# Altium PCB Rev3.PcbDoc (part 1 of 3)
Units mil, origin at the board's own origin, x right, y up, seen from the top; angles counter-clockwise.
Board outline 3350 x 2700 mil, 4 copper layers (Top Layer, GND, VCC, Bottom Layer), stack 23.756 mil thick; 157 components, 90 nets, 509 pads, 166 vias.
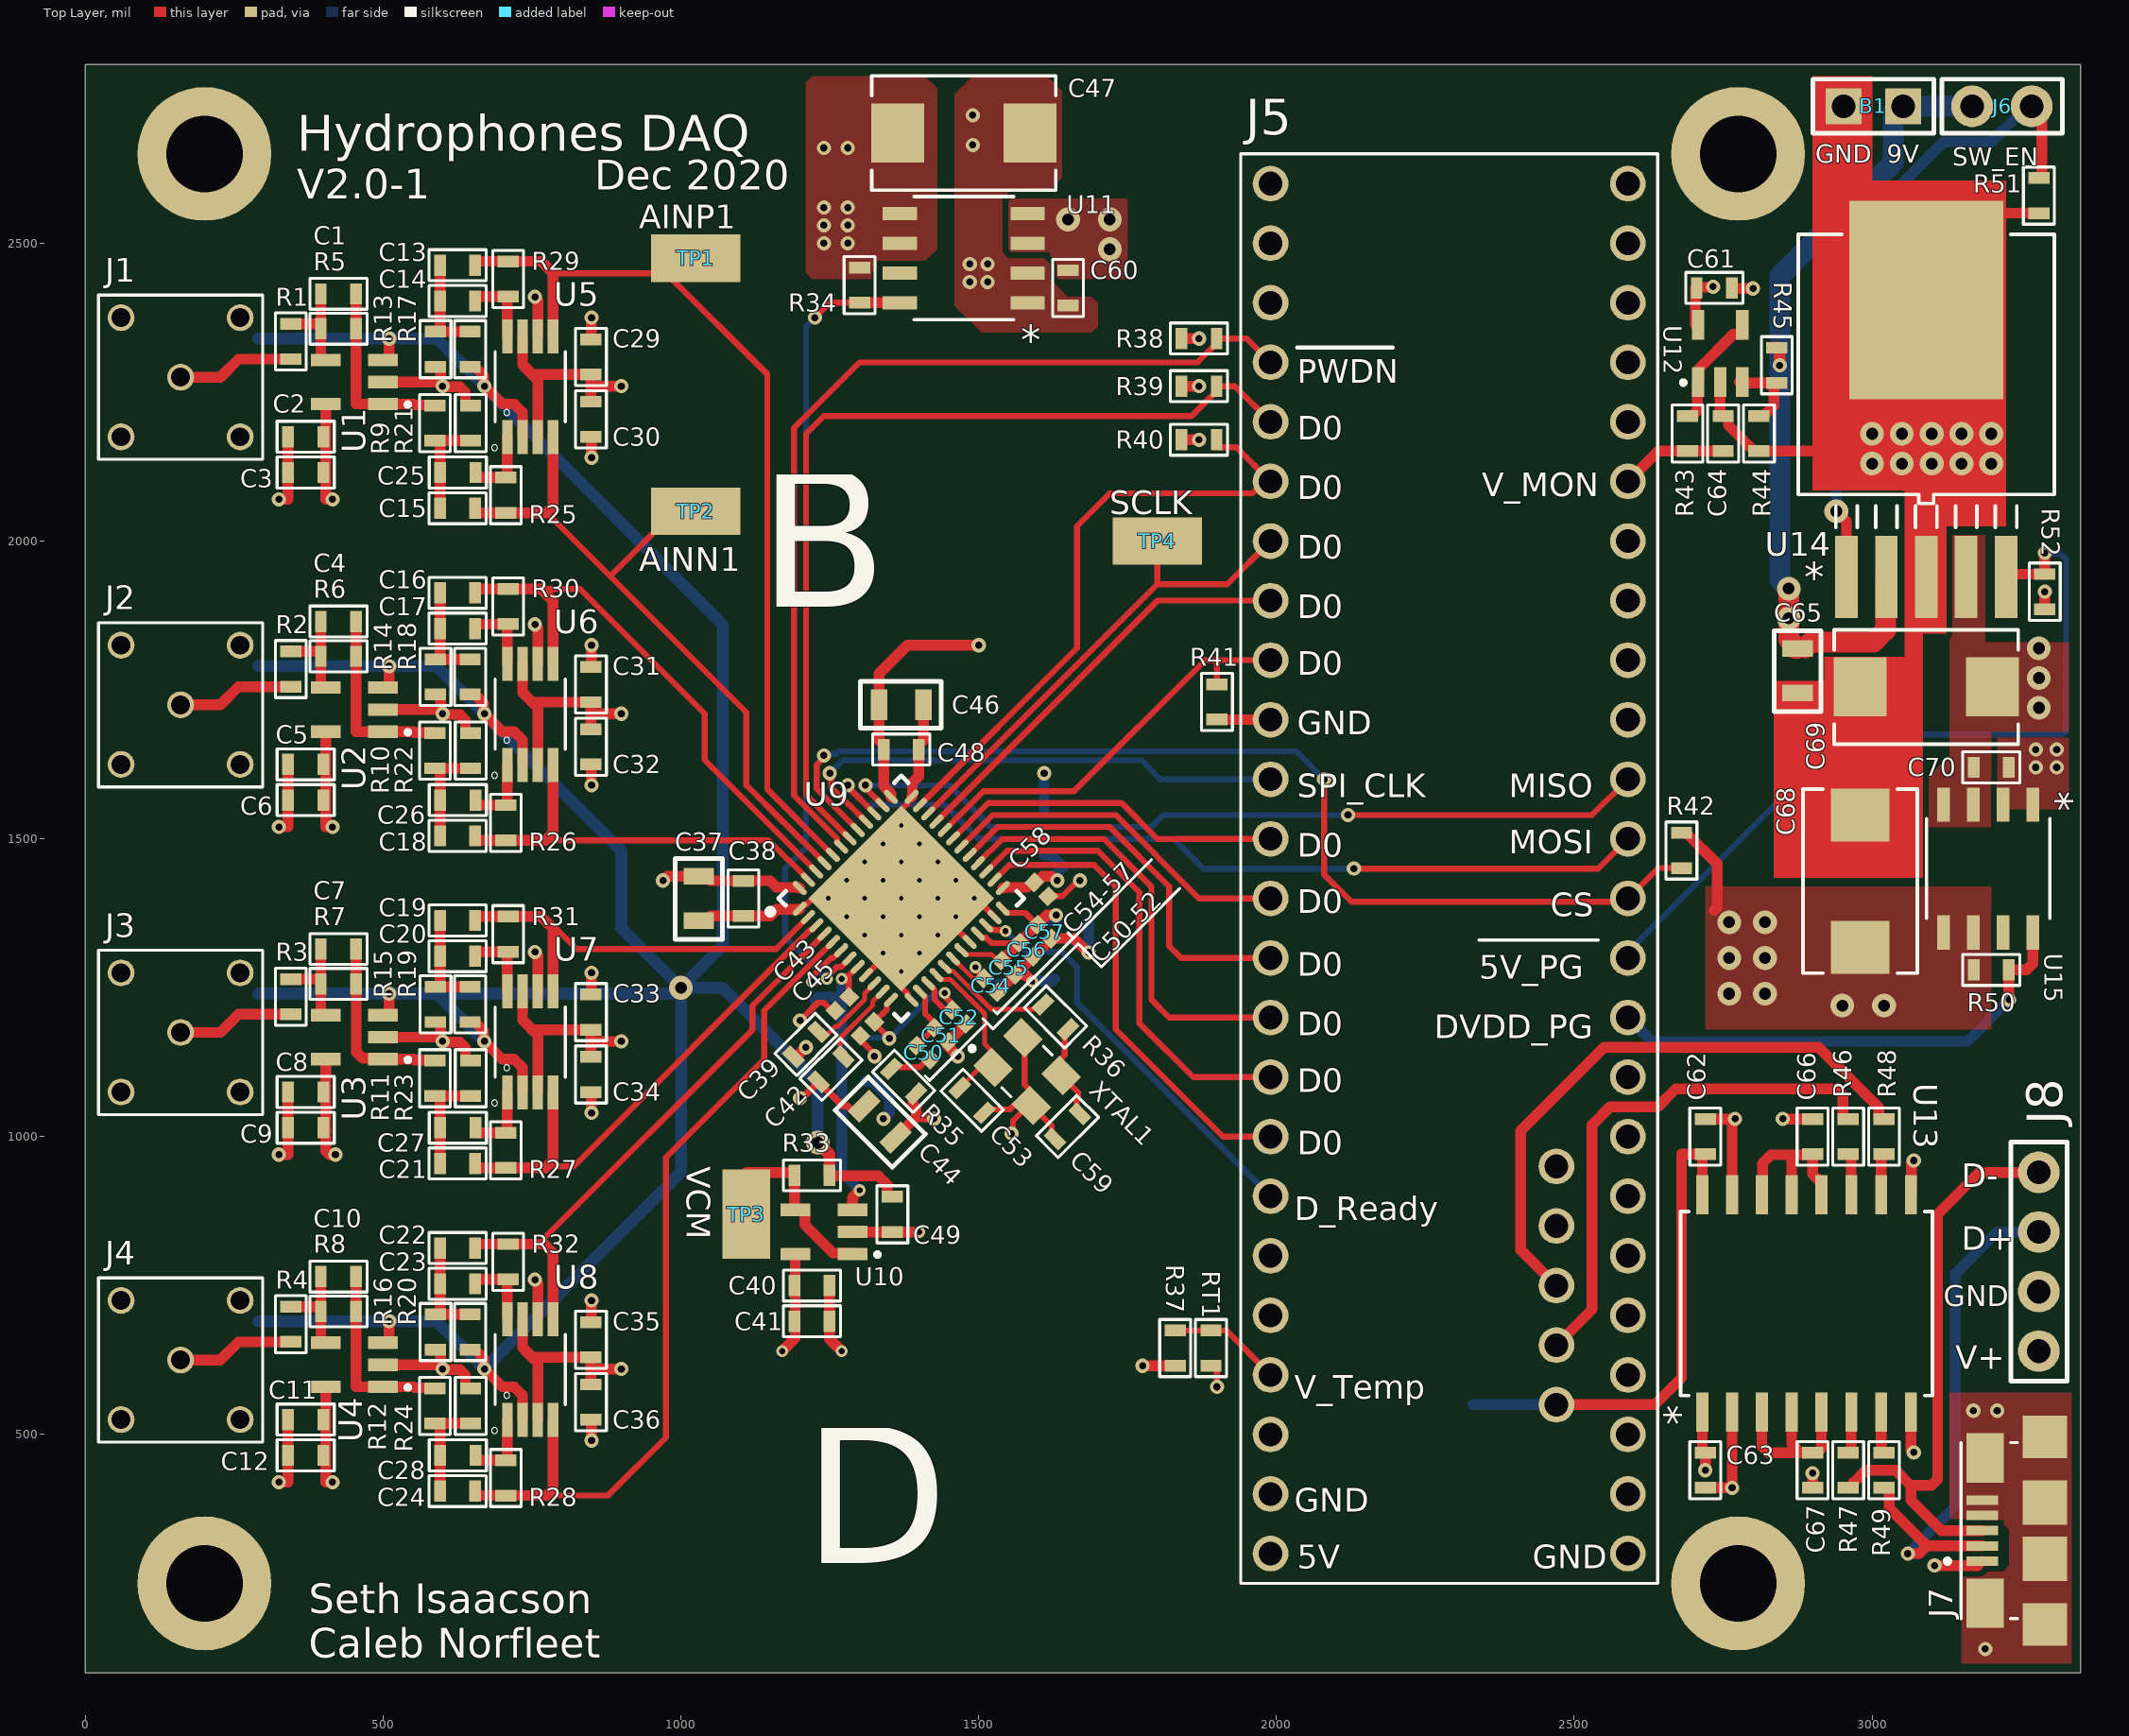
[diagram p0: Top Layer view]
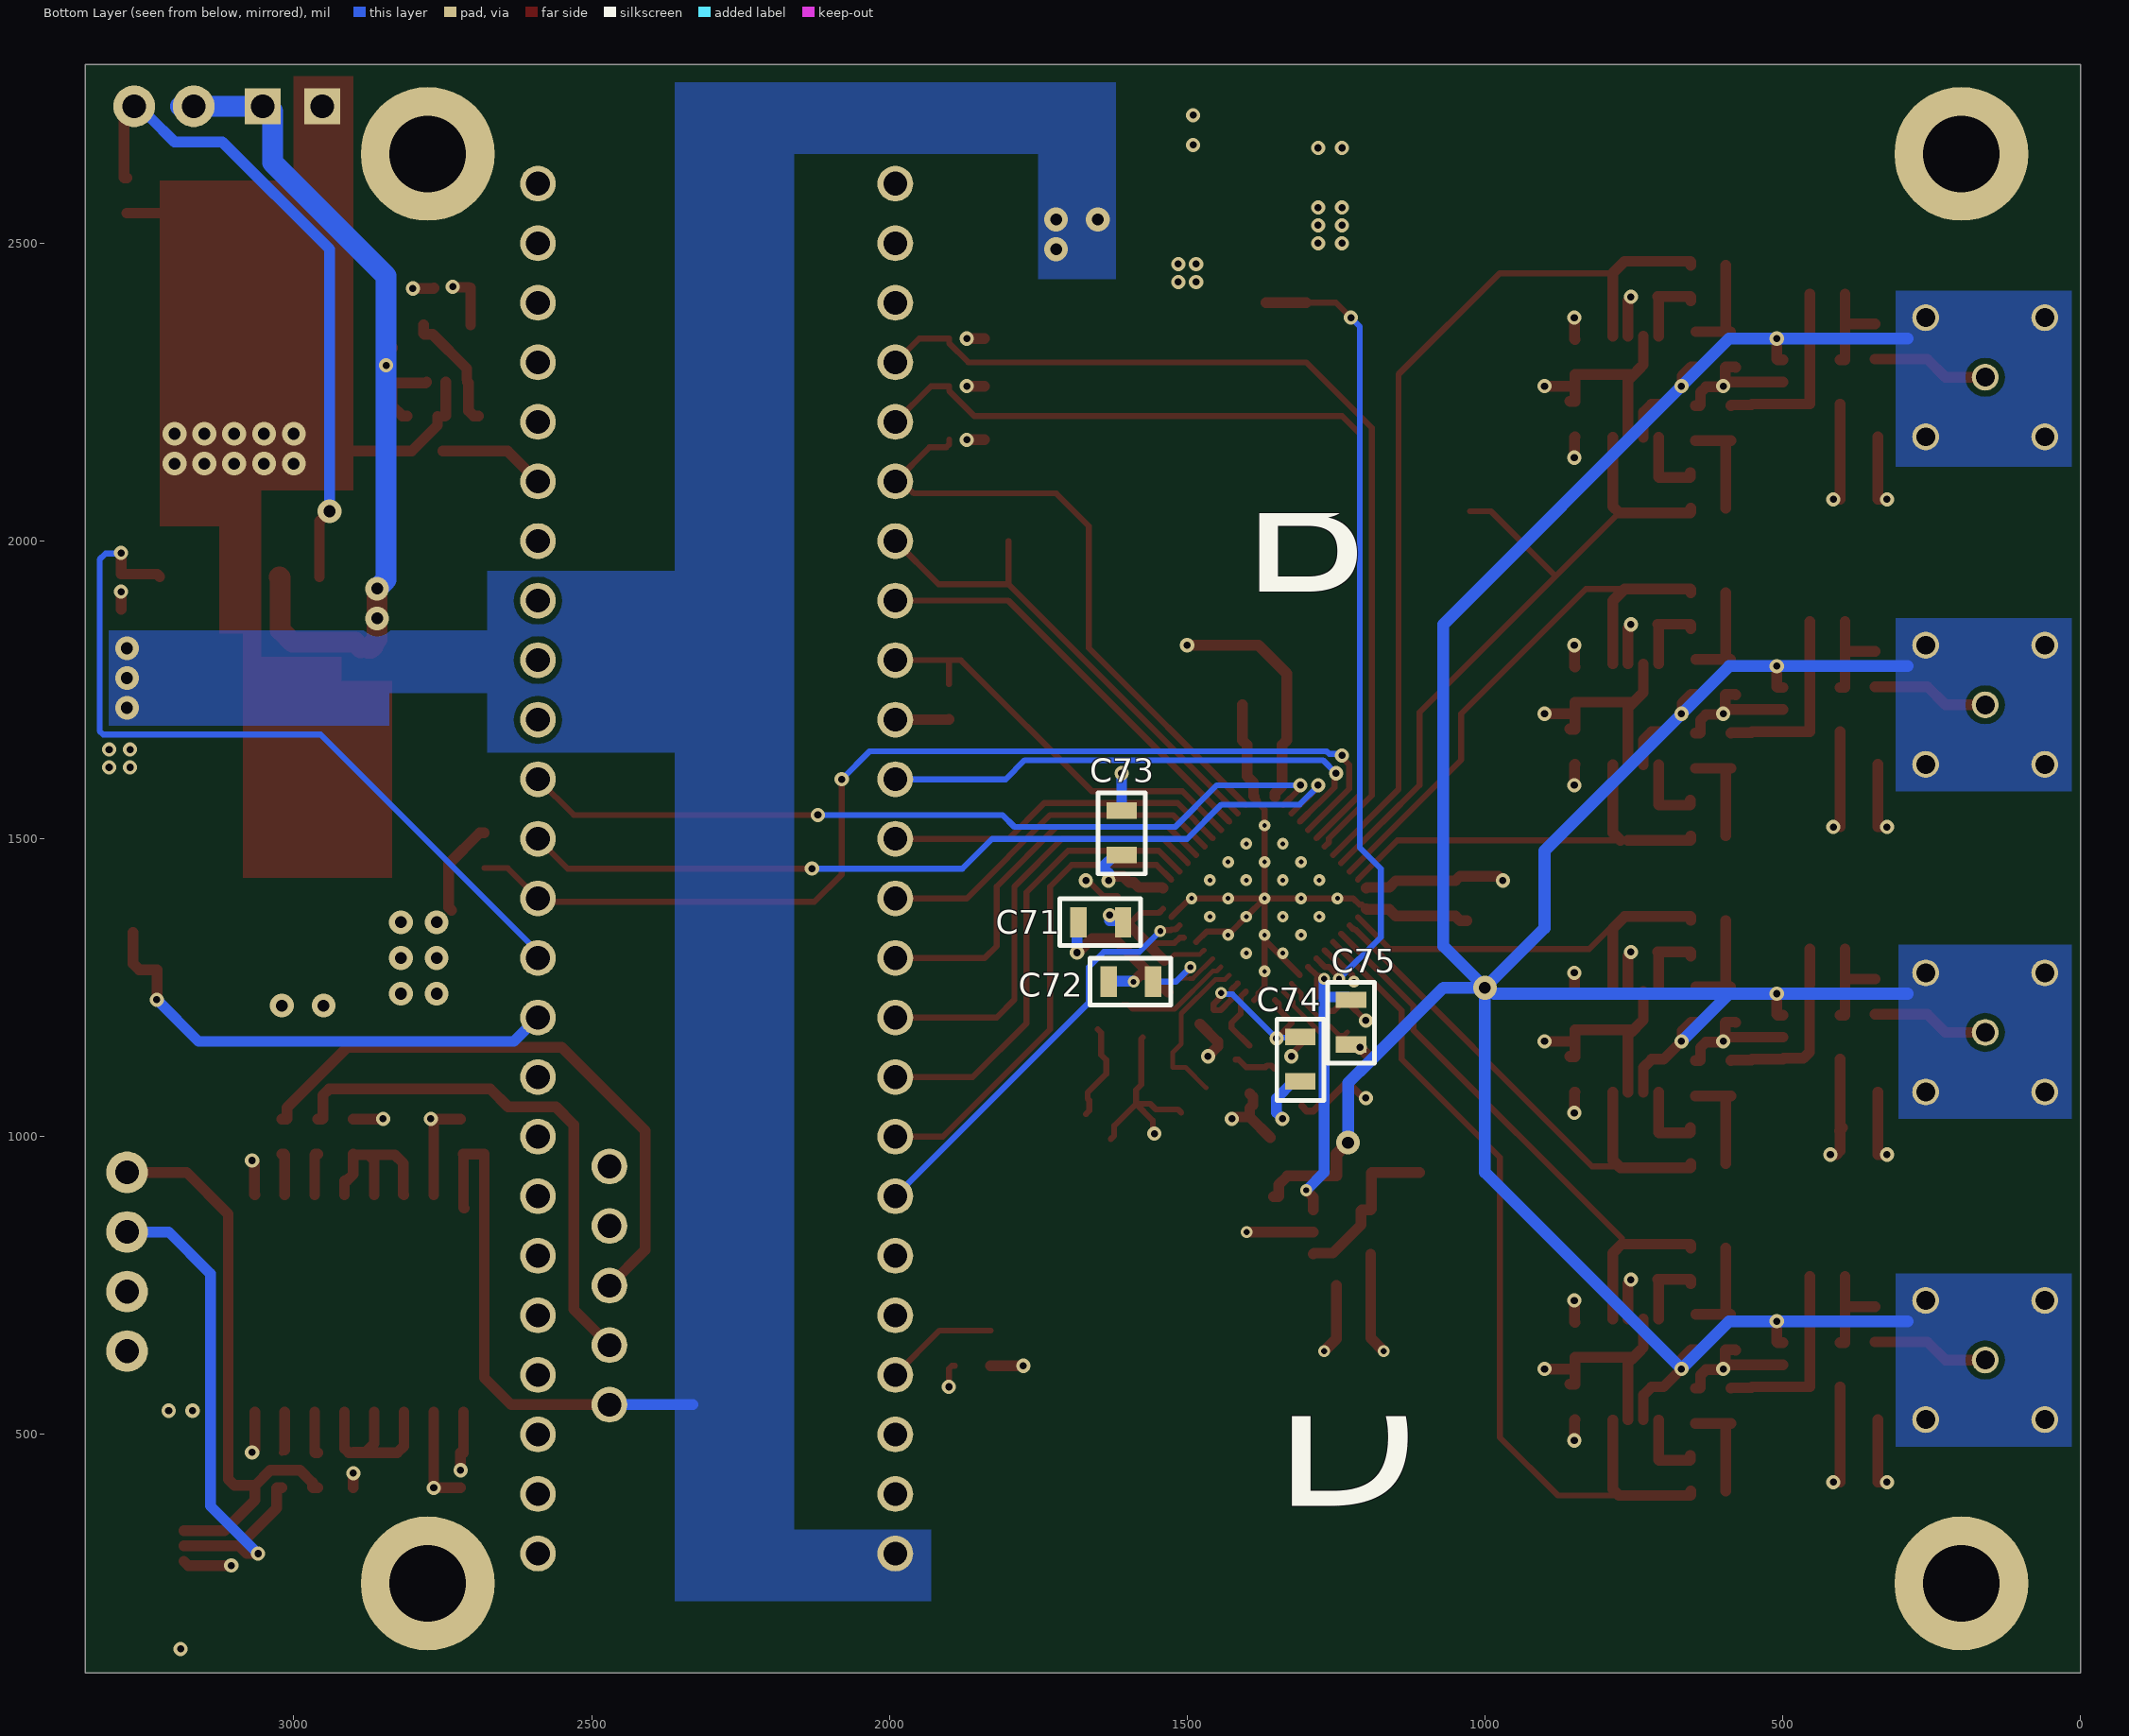
[diagram p1: Bottom Layer view, seen from below]
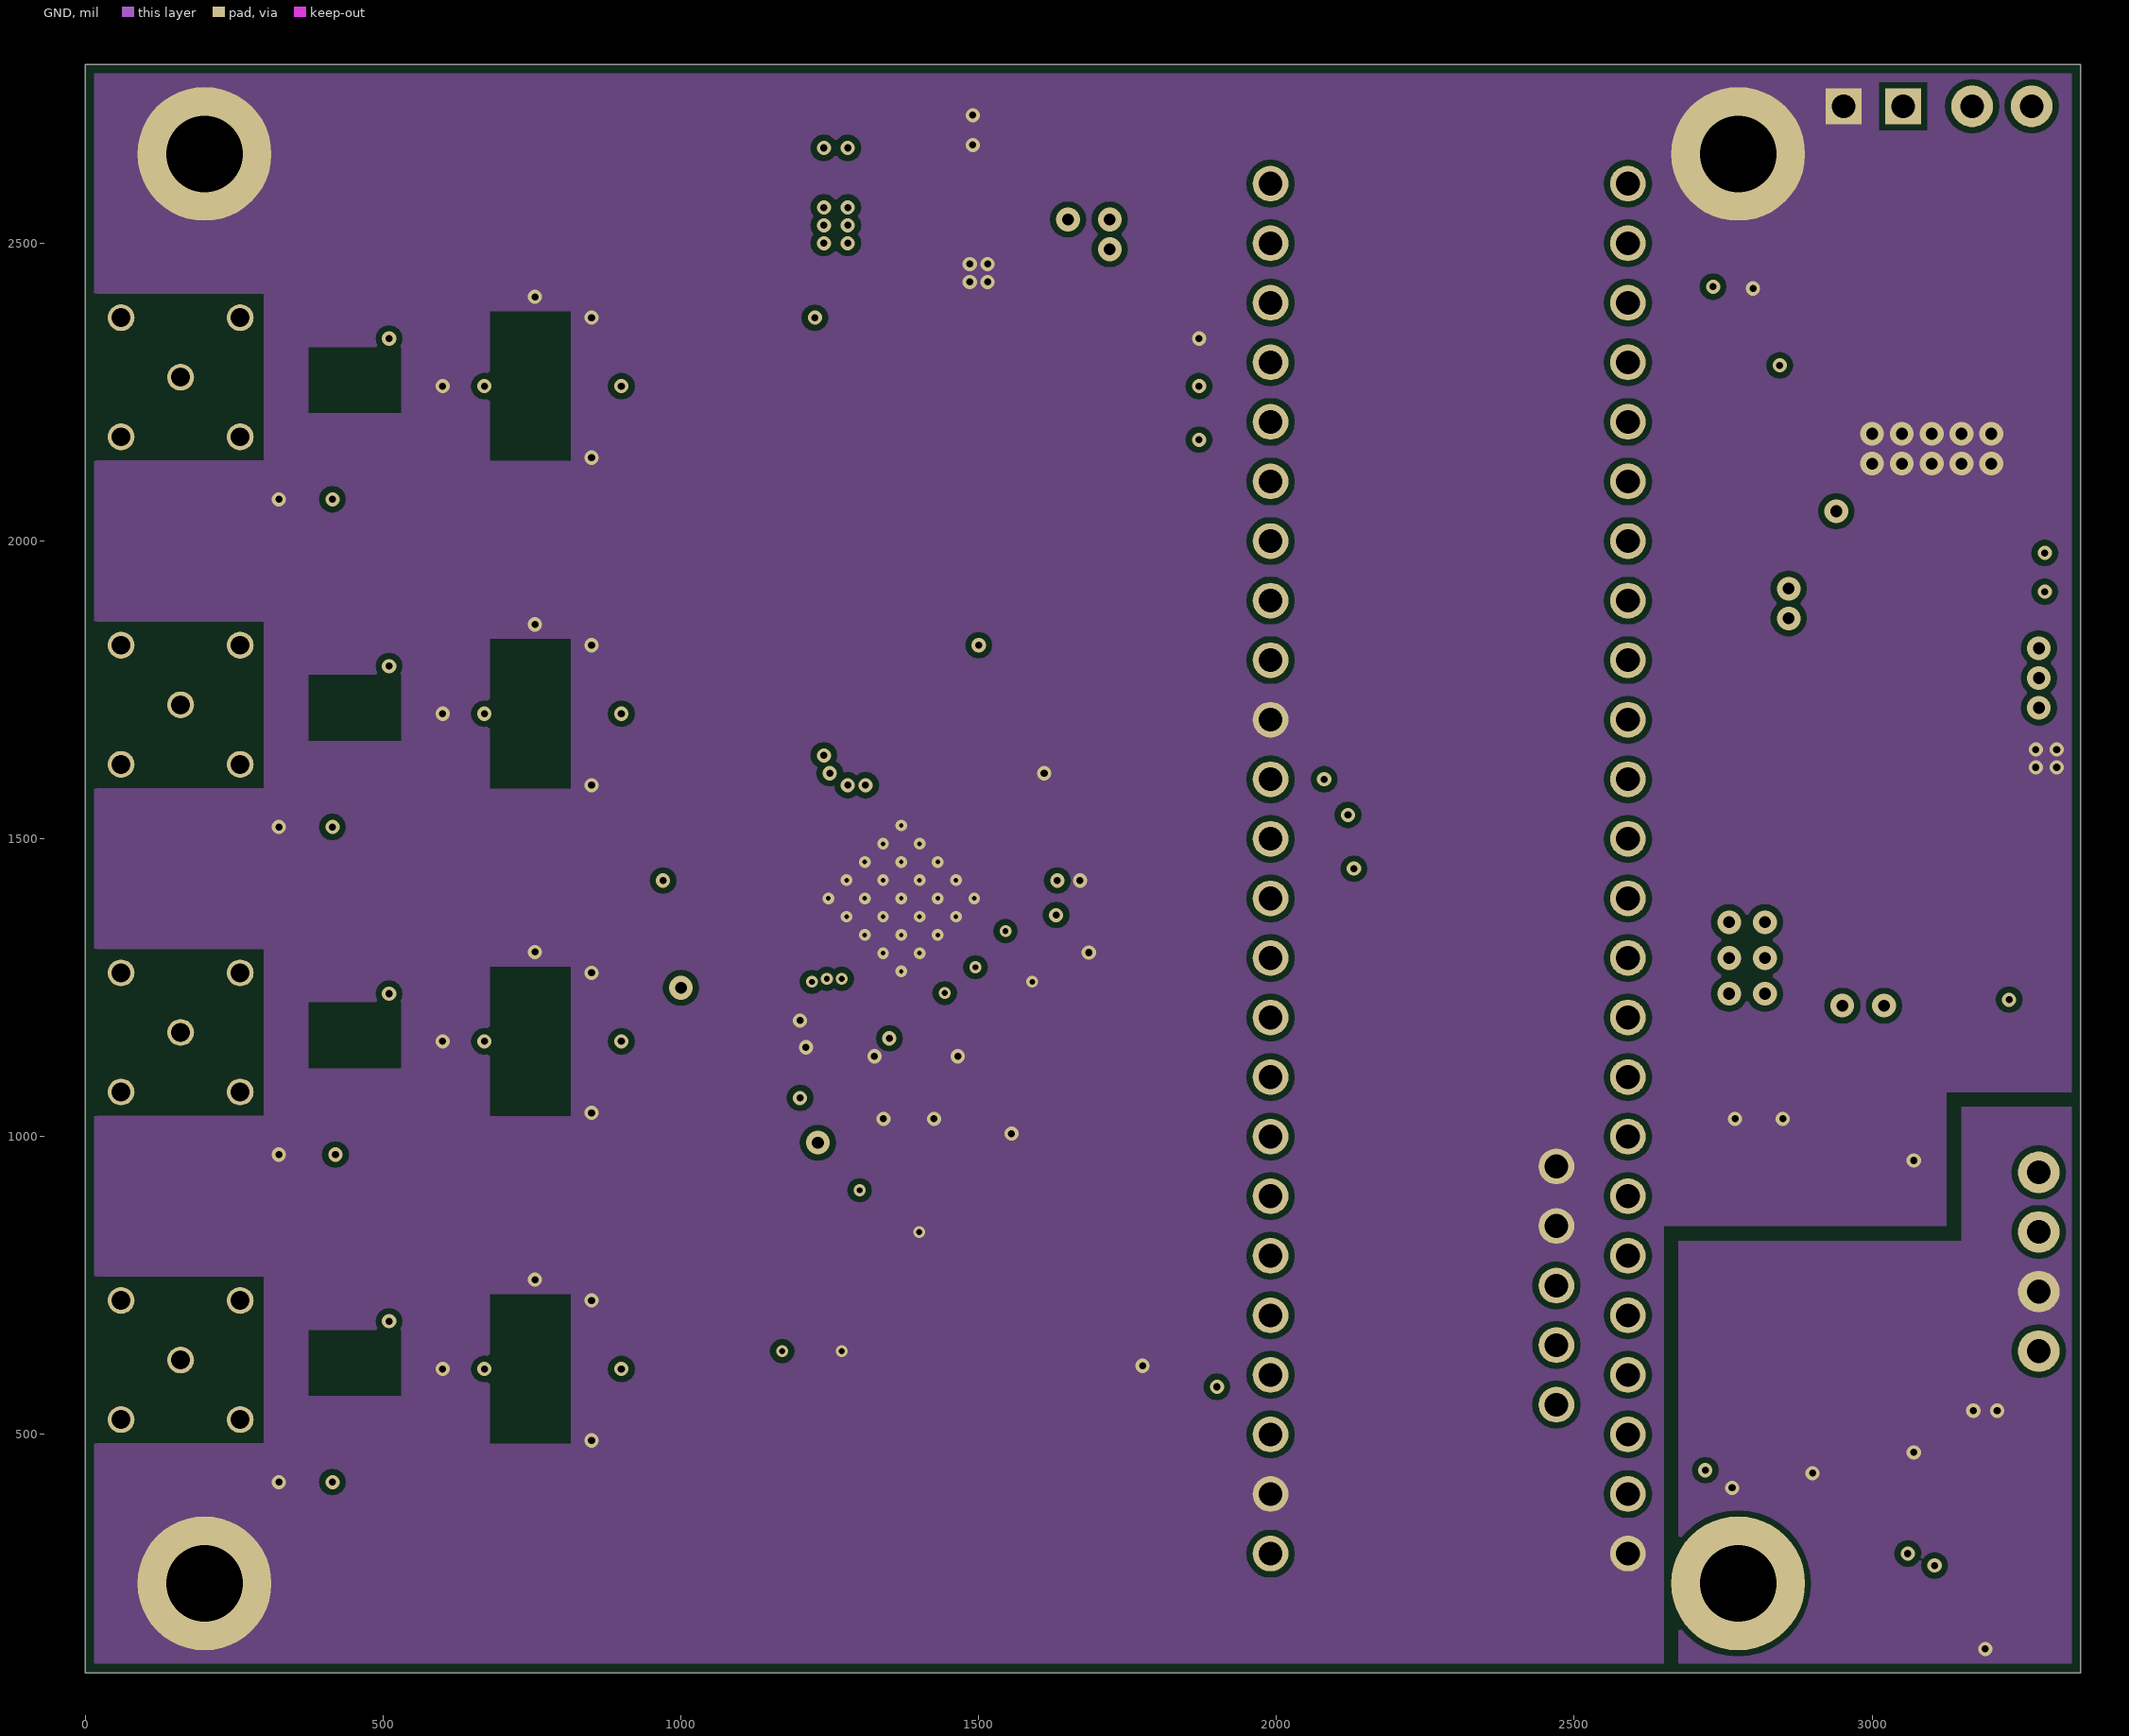
[diagram p2: GND]
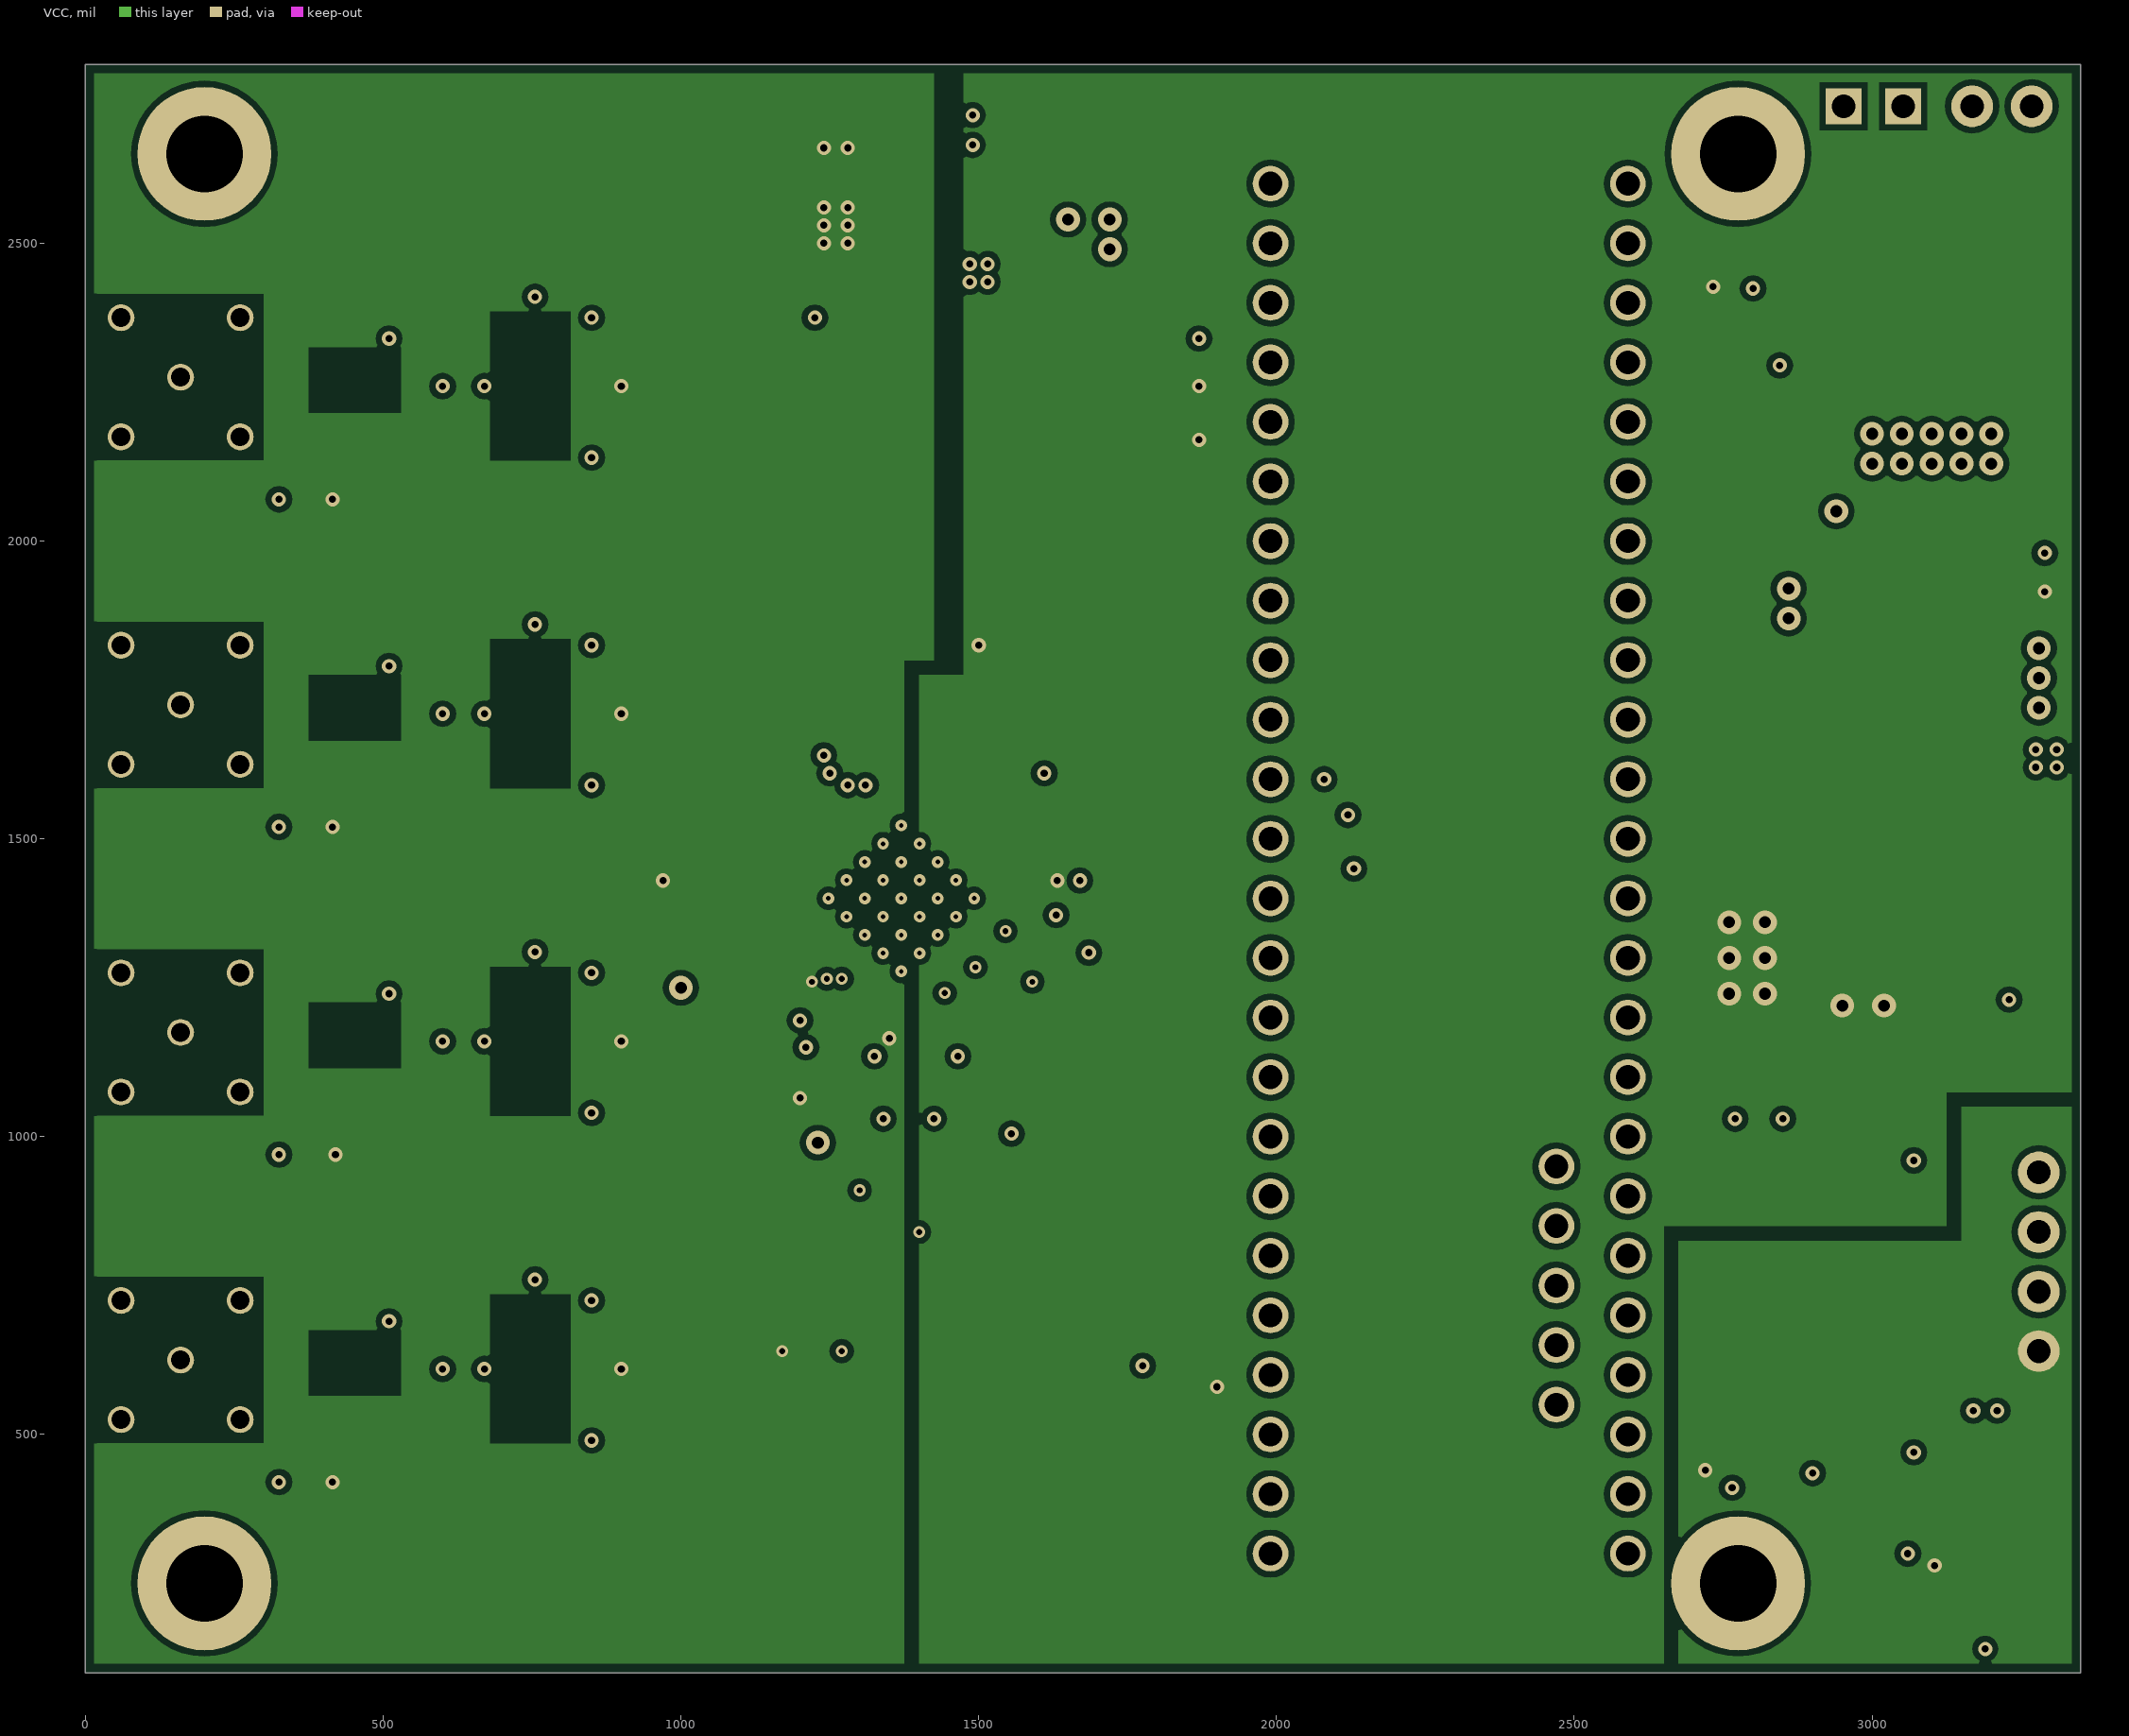
[diagram p3: VCC]
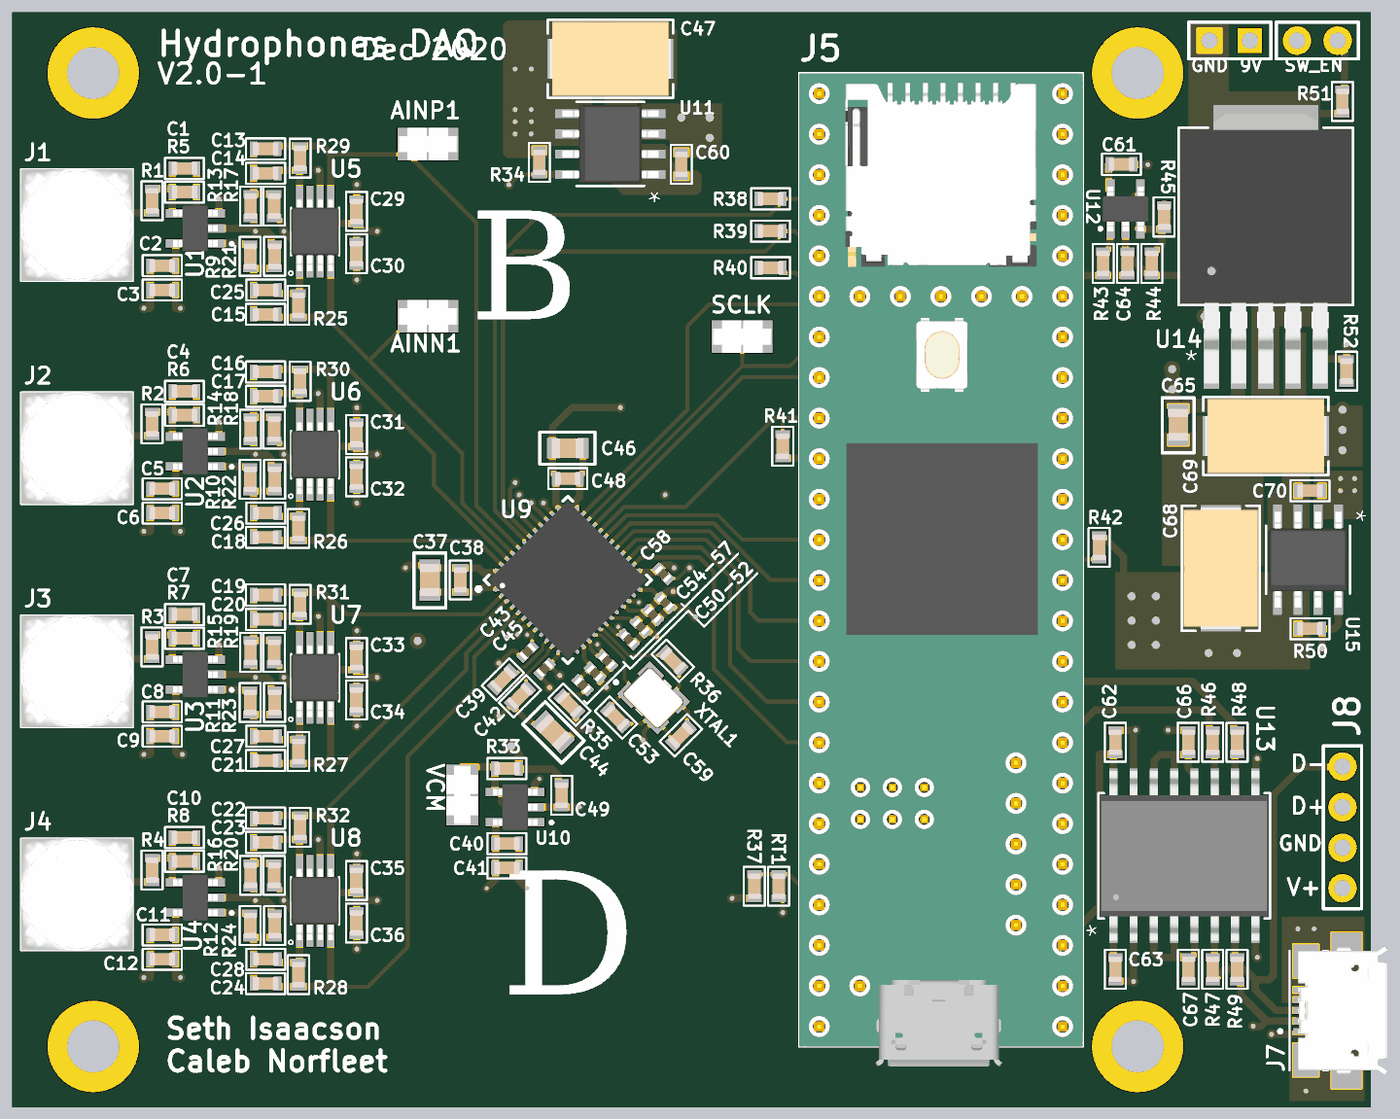
[diagram p5: 3D render of the assembled board from above, using the file's embedded part models]
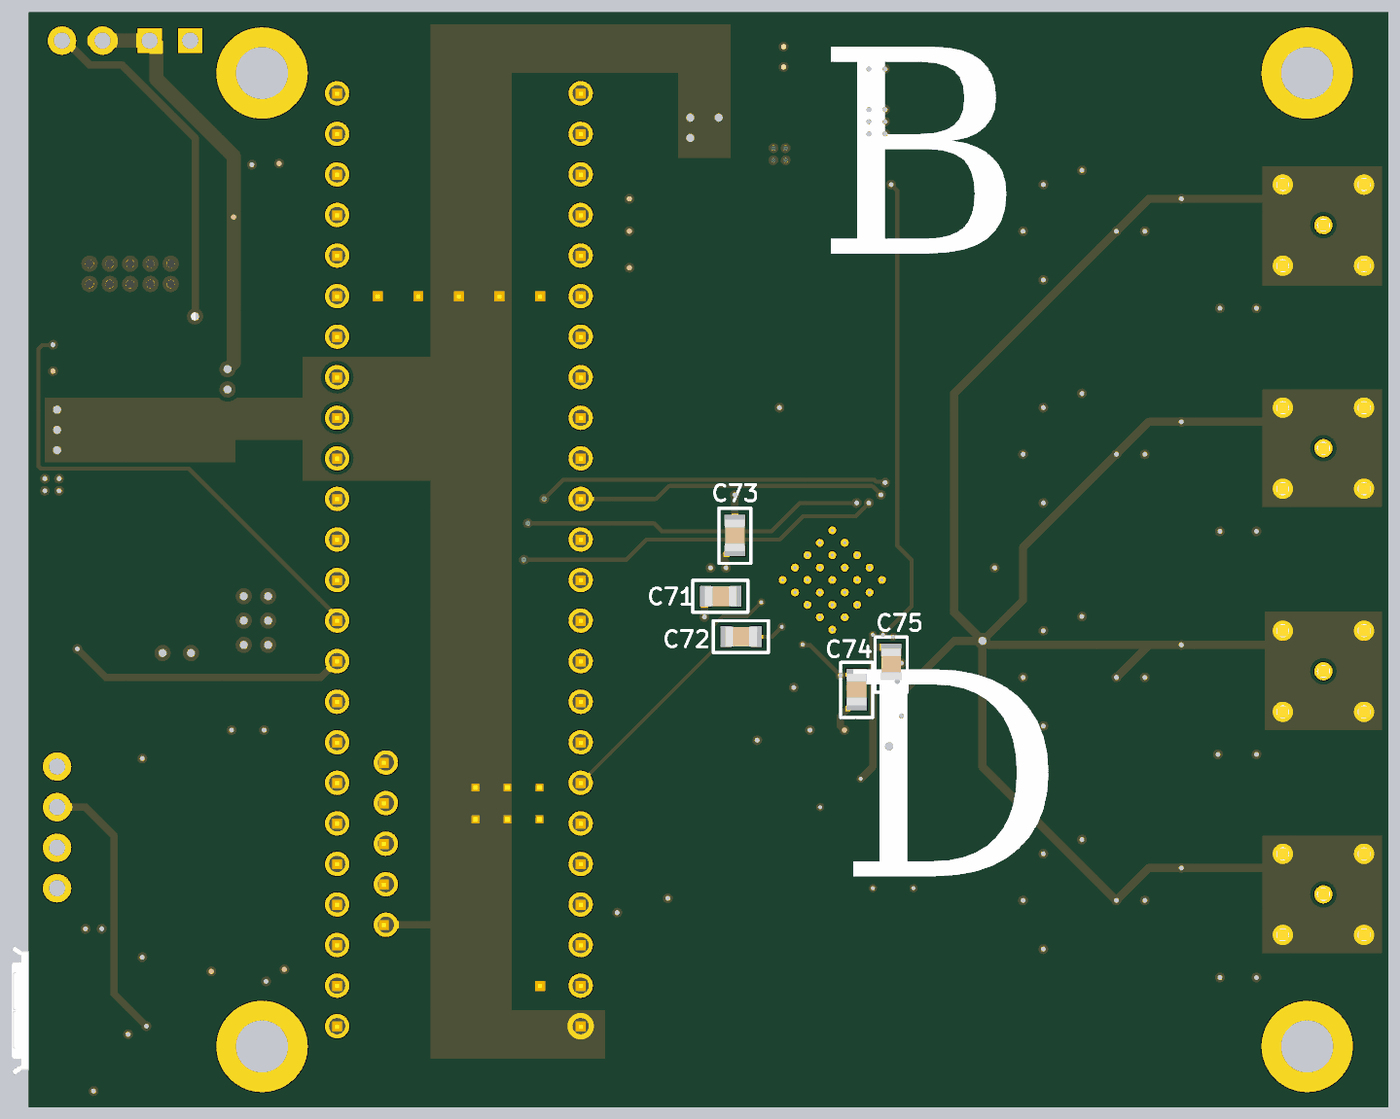
[diagram p6: 3D render of the assembled board from below, using the file's embedded part models]

## Layer stack, top to bottom
Top Solder: solder mask 0.4, Solder Resist, Dk 3.5
Top Layer: signal copper 1.4
Dielectric 2: prepreg 2.8, PP-006, Dk 4.1
GND: signal copper 1.378
Dielectric 1: dielectric 12.6, FR-4, Dk 4.8
VCC: signal copper 1.378
Dielectric 3: prepreg 2.8, PP-006, Dk 4.1
Bottom Layer: signal copper 1.4
Bottom Solder: solder mask 0.4, Solder Resist, Dk 3.5

## Board outline
0,100 3350,100 3350,2800 0,2800

## Design rules (kind name [scope] priority, off if disabled: settings)
BoardOutlineClearance [All] p1: gap=15 ignorepadtopadclearanceinfootprint=FALSE
Clearance "Clearance Polygons" [InPolygon] p1: gap=10 ignorepadtopadclearanceinfootprint=FALSE except(0: Arc-Hole Track-Hole SMDPad-Hole THPad-Hole Via-Hole Fill-Hole Poly-Hole Region-Hole Text-Hole)
Clearance [All] p2: gap=5 ignorepadtopadclearanceinfootprint=FALSE except(0: Arc-Hole Track-Hole SMDPad-Hole THPad-Hole Via-Hole Fill-Hole Poly-Hole Region-Hole Text-Hole)
ComponentClearance "HM-TRP & UFL" [InComponent('X1') vs InComponent('U1')] p1: gap=0 collisioncheckmode=3 verticalgap=0 showdistances=FALSE
ComponentClearance [All] p2: gap=1 collisioncheckmode=3 verticalgap=1 showdistances=FALSE
DiffPairsRouting [All] p1: maxlimit=393.7 minlimit=5 mostfreqgap=8 toplayer_minwidth=5 toplayer_maxwidth=15 toplayer_prefwidth=8 midlayer1_minwidth=5 midlayer1_maxwidth=15 midlayer1_prefwidth=8 midlayer2_minwidth=5 midlayer2_maxwidth=15 midlayer2_prefwidth=8 bottomlayer_minwidth=5 bottomlayer_maxwidth=15 bottomlayer_prefwidth=8 substack1={538958B0-A76F-46A8-ABC2-5979087BEA3F} toplayer_{538958b0-a76f-46a8-abc2-5979087bea3f}_mingap=10 toplayer_{538958b0-a76f-46a8-abc2-5979087bea3f}_maxgap=10 toplayer_{538958b0-a76f-46a8-abc2-5979087bea3f}_prefgap=10 toplayer_{538958b0-a76f-46a8-abc2-5979087bea3f}_minwidth=15 toplayer_{538958b0-a76f-46a8-abc2-5979087bea3f}_maxwidth=15 toplayer_{538958b0-a76f-46a8-abc2-5979087bea3f}_prefwidth=15 midlayer1_{538958b0-a76f-46a8-abc2-5979087bea3f}_mingap=10 midlayer1_{538958b0-a76f-46a8-abc2-5979087bea3f}_maxgap=10 midlayer1_{538958b0-a76f-46a8-abc2-5979087bea3f}_prefgap=10 midlayer1_{538958b0-a76f-46a8-abc2-5979087bea3f}_minwidth=15 midlayer1_{538958b0-a76f-46a8-abc2-5979087bea3f}_maxwidth=15 midlayer1_{538958b0-a76f-46a8-abc2-5979087bea3f}_prefwidth=15 midlayer2_{538958b0-a76f-46a8-abc2-5979087bea3f}_mingap=10 midlayer2_{538958b0-a76f-46a8-abc2-5979087bea3f}_maxgap=10 midlayer2_{538958b0-a76f-46a8-abc2-5979087bea3f}_prefgap=10 midlayer2_{538958b0-a76f-46a8-abc2-5979087bea3f}_minwidth=15 midlayer2_{538958b0-a76f-46a8-abc2-5979087bea3f}_maxwidth=15 midlayer2_{538958b0-a76f-46a8-abc2-5979087bea3f}_prefwidth=15 bottomlayer_{538958b0-a76f-46a8-abc2-5979087bea3f}_mingap=10 bottomlayer_{538958b0-a76f-46a8-abc2-5979087bea3f}_maxgap=10 bottomlayer_{538958b0-a76f-46a8-abc2-5979087bea3f}_prefgap=10 bottomlayer_{538958b0-a76f-46a8-abc2-5979087bea3f}_minwidth=15 bottomlayer_{538958b0-a76f-46a8-abc2-5979087bea3f}_maxwidth=15 bottomlayer_{538958b0-a76f-46a8-abc2-5979087bea3f}_prefwidth=15 maxuncoupledlength=500
HoleSize [All] p1: absolutevalues=TRUE maxlimit=265 minlimit=7.5 maxpercent=80.000 minpercent=20.000
HoleToHoleClearance [All] p1: gap=10 allowstackedmicrovias=FALSE
MinimumAnnularRing [All] p1: minimumring=4
MinimumSolderMaskSliver [All] p1: minsoldermaskwidth=0
PlaneClearance [All] p1: clearance=10
PlaneConnect [All] p1: planeconnectstyle=Relief reliefexpansion=4 reliefentries=4 reliefconductorwidth=6 reliefairgap=6
PolygonConnect "Via connect style" [isVia] p1: connectstyle=Direct reliefconductorwidth=10 reliefentries=4 polygonreliefangle="90 Angle" airgapwidth=10
PolygonConnect [All] p2: connectstyle=Direct reliefconductorwidth=10 reliefentries=4 polygonreliefangle="90 Angle" airgapwidth=6
RoomDefinition ACH4 [InComponentClass('Room Definition 8')] p1: confinementstyle=ConfineIn formatcopy=TRUE lockcomponents=FALSE outline 15,375 880,375 880,845 15,845
RoomDefinition ACH3 [InComponentClass('Room Definition 7')] p2: confinementstyle=ConfineIn formatcopy=TRUE lockcomponents=FALSE outline 15,925 880,925 880,1395 15,1395
RoomDefinition ACH2 [InComponentClass('Room Definition 6')] p3: confinementstyle=ConfineIn formatcopy=TRUE lockcomponents=FALSE outline 15,1475 880,1475 880,1945 15,1945
RoomDefinition ACH1 [InComponentClass('Room Definition 5')] p4: confinementstyle=ConfineIn formatcopy=TRUE lockcomponents=FALSE outline 15,2025 880,2025 880,2495 15,2495
RoutingCorners [All] p1: cornerstyle=45-Degree minsetback=49.21 maxsetback=49.21
RoutingVias [All] p1: holewidth=12 width=22 viastyle="Through Hole" minholewidth=10 minwidth=18 maxholewidth=100 maxwidth=114
SilkToSilkClearance [All] p1: silktosilkclearance=0
SilkToSolderMaskClearance [IsPad] p1: minsilkscreentomaskgap=5 clearancetoexposedcopper=TRUE
SolderMaskExpansion [All] p1: expansion=2.5 istentingtop=FALSE
Width GND [InNet('GND')] p1: maxlimit=30 minlimit=10 preferedwidth=20
Width Power [InNetClass('Power')] p2: maxlimit=40 minlimit=20 preferedwidth=30
Width 3V3 [InNetClass('3V3')] p3: maxlimit=30 minlimit=10 preferedwidth=20
Width [All] p4: maxlimit=400 minlimit=6 preferedwidth=8
20 further rules are at their usual default settings.

## Classes and differential pairs
component class "Room Definition 8": C10 C11 C12 C22 C23 C24 C28 C35 C36 J4 R4 R8 R12 R16 R20 R24 R28 R32 U8
component class "Room Definition 7": C7 C8 C9 C19 C20 C21 C27 C33 C34 J3 R3 R7 R11 R15 R19 R23 R27 R31 U3 U7
component class "Room Definition 6": C4 C5 C6 C16 C17 C18 C26 C31 C32 J2 R2 R6 R10 R14 R18 R22 R26 R30 U6
component class "Room Definition 5": C1 C2 C3 C13 C14 C15 C25 C29 C30 J1 R1 R5 R9 R13 R17 R21 R25 R29 U1 U5
component class "Room Definition 4": C10 C11 C12 C23 C41 C51 C52 C55 C58 J4 R4 R5 R28 R29 R37 R40 R42 R51 U14
component class "Room Definition 3": C5 C7 C9 C21 C27 C32 C34 C44 C72 J6 R2 R7 R19 R31 R33 R35 R40 R47 U3 U12
component class "Room Definition 2": C5 C7 C9 C21 C32 C54 C56 C62 C69 J2 R2 R7 R15 R22 R31 R41 R45 R47 U9 U10
component class "Room Definition 1": C12 C23 C48 C58 C61 C64 C67 C71 C74 J8 R4 R5 R28 R29 R39 R44 R49 R52 U13
channel class "Analog Channel": ANALOG1 ANALOG2 ANALOG3 ANALOG4
channel class 3V3Supply: AVDD DVDD
net class AINN_BUS[1..4]: AINN_BUS1 AINN_BUS2 AINN_BUS3 AINN_BUS4
net class AINN[1..4]: AINN1 AINN2 AINN3 AINN4
net class ADC_DATA[0..7]: ADC_DATA0 ADC_DATA1 ADC_DATA2 ADC_DATA3 ADC_DATA4 ADC_DATA5 ADC_DATA6 ADC_DATA7
component class USB: C62 C67 J8 R47 R49 U13

## Components (designator, comment, footprint, x,y, rotation, side; value= is the part's Value field where it differs from the comment)
B1 "9V" HEADERPINS_2X1_POWER 3104,2776 r180 top
C1 "330pF" C0603 425,2415 r0 top (schematic designator C6)
C2 ".1uF" C0603 370,2175 r180 top (schematic designator C3)
C3 "1uF" C0603 370,2115 r0 top (schematic designator C1)
C4 "330pF" C0603 425,1865 r0 top (schematic designator C6)
C5 ".1uF" C0603 370,1625 r180 top (schematic designator C3)
C6 "1uF" C0603 370,1565 r0 top (schematic designator C1)
C7 "330pF" C0603 425,1315 r0 top (schematic designator C6)
C8 ".1uF" C0603 370,1075 r180 top (schematic designator C3)
C9 "1uF" C0603 370,1015 r0 top (schematic designator C1)
C10 "330pF" C0603 425,765 r0 top (schematic designator C6)
C11 ".1uF" C0603 370,525 r180 top (schematic designator C3)
C12 "1uF" C0603 370,465 r0 top (schematic designator C1)
C13 "10nF" C0603 625,2463 r180 top (schematic designator C9)
C14 "10nF" C0603 625,2403 r0 top (schematic designator C8)
C15 "10nF" C0603 625,2055 r0 top (schematic designator C5)
C16 "10nF" C0603 625,1913 r180 top (schematic designator C9)
C17 "10nF" C0603 625,1853 r0 top (schematic designator C8)
C18 "10nF" C0603 625,1505 r0 top (schematic designator C5)
C19 "10nF" C0603 625,1363 r180 top (schematic designator C9)
C20 "10nF" C0603 625,1303 r0 top (schematic designator C8)
C21 "10nF" C0603 625,955 r0 top (schematic designator C5)
C22 "10nF" C0603 625,813 r180 top (schematic designator C9)
C23 "10nF" C0603 625,753 r0 top (schematic designator C8)
C24 "10nF" C0603 625,405 r0 top (schematic designator C5)
C25 "10nF" C0603 625.47,2115 r0 top (schematic designator C7)
C26 "10nF" C0603 625.47,1565 r0 top (schematic designator C7)
C27 "10nF" C0603 625.47,1015 r0 top (schematic designator C7)
C28 "10nF" C0603 625.47,465 r0 top (schematic designator C7)
C29 "1uF" C0603 849,2309 r270 top (schematic designator C2)
C30 ".1uF" C0603 849,2204.47 r270 top (schematic designator C4)
C31 "1uF" C0603 849,1759 r270 top (schematic designator C2)
C32 ".1uF" C0603 849,1654.47 r270 top (schematic designator C4)
C33 "1uF" C0603 849,1209 r270 top (schematic designator C2)
C34 ".1uF" C0603 849,1104.47 r270 top (schematic designator C4)
C35 "1uF" C0603 849,659 r270 top (schematic designator C2)
C36 ".1uF" C0603 849,554.47 r270 top (schematic designator C4)
C37 "10uF" C0805 1030,1400 r90 top (schematic designator C15)
C38 ".1uF" C0603 1105,1400 r270 top (schematic designator C16)
C39 ".47uF" C0603 1210,1155 r225 top (schematic designator C21)
C40 ".1uF" C0603 1220,750 r0 top (schematic designator C38)
C41 "2.2uF" C0603 1220,690 r0 top (schematic designator C37)
C42 ".47uF" C0603 1252,1113 r225 top (schematic designator C14)
C43 ".1uF" C0402 1271,1223 r45 top (schematic designator C22)
C44 "10uF" C0805 1334,1025 r135 top (schematic designator C18)
C45 ".1uF" C0402 1313,1181 r225 top (schematic designator C20)
C46 "10uF" C0805 1370,1725 r0 top (schematic designator C10)
C47 "22UF TANT" CAP_293D_D_VIS 1475,2685 r180 top (schematic designator C32)
C48 ".1uF" C0603 1370,1650 r180 top (schematic designator C11)
C49 "1uF" C0603 1355,869.53 r90 top (schematic designator C39)
C50 "5.6nF" C0402 1407,1141 r135 top (schematic designator C26)
C51 "390pF" C0402 1437,1171 r135 top (schematic designator C29)
C52 ".1uF" C0402 1467,1201 r135 top (schematic designator C30)
C53 "18pF" C0603 1489,1061 r135 top (schematic designator C40)
C54 ".1uF" C0402 1520,1254 r315 top (schematic designator C19)
C55 ".1uF" C0402 1550,1284 r135 top (schematic designator C25)
C56 ".1uF" C0402 1580,1314 r135 top (schematic designator C27)
C57 ".1uF" C0402 1610,1344 r135 top (schematic designator C46)
C58 ".1uF" C0402 1605,1415 r135 top (schematic designator C13)
C59 "18pF" C0603 1649,1017 r45 top (schematic designator C41)
C60 ".47uF" C0603 1650,2425 r90 top (schematic designator C31)
C61 ".1uF" C0603 2735,2425 r0 top (schematic designator C35)
C62 ".1uF" C0603 2720,1000 r270 top (schematic designator C45)
C63 ".1uF" C0603 2720,440 r90 top (schematic designator C42)
C64 ".1uF" C0603 2750,2180.47 r270 top (schematic designator C36)
C65 ".47uF" C0805 2875,1782.4 r90 top (schematic designator C33)
C66 ".1uF" C0603 2900,1000 r270 top (schematic designator C44)
C67 ".1uF" C0603 2900,440 r90 top (schematic designator C43)
C68 "22UF TANT" CAP_293D_D_VIS 2980,1429 r270 top (schematic designator C32)
C69 "22UF TANT" CAP_293D_D_VIS 3091,1755 r0 top (schematic designator C34)
C70 ".47uF" C0603 3200,1620 r180 top (schematic designator C31)
C71 "10uF" C0805 1645,1360 r180 bottom (schematic designator C24)
C72 "10uF" C0805 1594.36,1260.34 r180 bottom (schematic designator C17)
C73 "10uF" C0805 1610,1510 r90 bottom (schematic designator C12)
C74 "10uF" C0805 1310,1130 r90 bottom (schematic designator C28)
C75 "10uF" C0805 1225,1192.4 r90 bottom (schematic designator C23)
J1 "J" EPC.00.250.NTN 160,2275 r90 top
J2 "J" EPC.00.250.NTN 160,1725 r90 top (schematic designator J1)
J3 "J" EPC.00.250.NTN 160,1175 r90 top (schematic designator J1)
J4 "J" EPC.00.250.NTN 160,625 r90 top (schematic designator J1)
J5 "Teensy 4.1" TEENSY4.1 1940,250 r90 top (schematic designator J4)
J6 "2pin header" HEADERPINS_2X1 3319.96,2776 r180 top (schematic designator J2)
J7 "MicroUSB" HRS_ZX62-B-5PA(33) 3290,338.52 r90 top (schematic designator J3)
J8 "AUX_JUMPER" HEADERPINS_4X1 3280,940 r270 top (schematic designator J5)
R1 "330" R0603 345,2335 r90 top (schematic designator R5)
R2 "330" R0603 345,1785 r90 top (schematic designator R5)
R3 "330" R0603 345,1235 r90 top (schematic designator R5)
R4 "330" R0603 345,685 r90 top (schematic designator R5)
R5 "5M" R0603 425,2356.51 r0 top (schematic designator R1)
R6 "5M" R0603 425,1806.51 r0 top (schematic designator R1)
R7 "5M" R0603 425,1256.51 r0 top (schematic designator R1)
R8 "5M" R0603 425,706.51 r0 top (schematic designator R1)
R9 "523" R0603 587,2198 r270 top (schematic designator R3)
R10 "523" R0603 587,1648 r270 top (schematic designator R3)
R11 "523" R0603 587,1098 r270 top (schematic designator R3)
R12 "523" R0603 587,548 r270 top (schematic designator R3)
R13 "383" R0603 588,2322 r270 top (schematic designator R6)
R14 "383" R0603 588,1772 r270 top (schematic designator R6)
R15 "383" R0603 588,1222 r270 top (schematic designator R6)
R16 "383" R0603 588,672 r270 top (schematic designator R6)
R17 "523" R0603 646,2322 r90 top (schematic designator R7)
R18 "523" R0603 646,1772 r90 top (schematic designator R7)
R19 "523" R0603 646,1222 r90 top (schematic designator R7)
R20 "523" R0603 646,672 r90 top (schematic designator R7)
R21 "383" R0603 647,2198 r270 top (schematic designator R4)
R22 "383" R0603 647,1648 r270 top (schematic designator R4)
R23 "383" R0603 647,1098 r270 top (schematic designator R4)
R24 "383" R0603 647,548 r270 top (schematic designator R4)
R25 "1.27K" R0603 706,2077 r270 top (schematic designator R2)
R26 "1.27K" R0603 706,1527 r270 top (schematic designator R2)
R27 "1.27K" R0603 706,977 r270 top (schematic designator R2)
R28 "1.27K" R0603 706,427 r270 top (schematic designator R2)
R29 "1.27K" R0603 710,2440 r270 top (schematic designator R8)
R30 "1.27K" R0603 710,1890 r270 top (schematic designator R8)
R31 "1.27K" R0603 710,1340 r270 top (schematic designator R8)
R32 "1.27K" R0603 710,790 r270 top (schematic designator R8)
R33 "1K" R0603 1220,935 r0 top (schematic designator R22)
R34 "150k" R0603 1300,2429.53 r90 top (schematic designator R15)
R35 "1K" R0603 1374,1093 r135 top (schematic designator R10)
R36 "121" R0603 1629,1201 r135 top (schematic designator R23)
R37 "10k" R0603 1830,645 r90 top (schematic designator R21)
R38 "10k" R0603 1870,2340 r0 top (schematic designator R9)
R39 "10k" R0603 1870,2260 r180 top (schematic designator R12)
R40 "10k" R0603 1870,2170 r180 top (schematic designator R14)
R41 "10k" R0603 1900,1730 r90 top (schematic designator R11)
R42 "10k" R0603 2680,1480.47 r90 top (schematic designator R13)
R43 "150k" R0603 2690,2180.47 r270 top (schematic designator R18)
R44 "10k" R0603 2810,2180.47 r90 top (schematic designator R20)
R45 "20k" R0603 2840,2295 r270 top (schematic designator R19)
R46 "24" C0603 2960,1000 r90 top (schematic designator R27)
R47 "24" C0603 2960,440 r90 top (schematic designator R26)
R48 "24" C0603 3020,1000 r90 top (schematic designator R25)
R49 "24" C0603 3020,440 r90 top (schematic designator R24)
R50 "150k" R0603 3200,1280 r180 top (schematic designator R15)
R51 "10k" R0603 3280,2580 r90 top (schematic designator R17)
R52 "10k" R0603 3290,1915 r270 top (schematic designator R16)
RT1 "10K" R0603 1890,645 r90 top
TP1 "TP" TP_5029 1025,2475 r90 top (schematic designator TP2)
TP2 "TP" TP_5029 1025,2050 r90 top (schematic designator TP1)
TP3 "TP" TP_5029 1110,870 r0 top (schematic designator TP4)
TP4 "TP" TP_5029 1800,2000 r90 top (schematic designator TP3)
U1 "OPA320" SOT-23-5 451.53,2267 r180 top (schematic designator U2)
U2 "OPA320" SOT-23-5 451.53,1717 r180 top
U3 "OPA320" SOT-23-5 451.53,1167 r180 top (schematic designator U2)
U4 "OPA320" SOT-23-5 451.53,617 r180 top (schematic designator U2)
U5 "THS4551IDGKT" 8-VSSOP-THS4551 747,2259 r90 top (schematic designator U1)
U6 "THS4551IDGKT" 8-VSSOP-THS4551 747,1709 r90 top (schematic designator U1)
U7 "THS4551IDGKT" 8-VSSOP-THS4551 747,1159 r90 top (schematic designator U1)
U8 "THS4551IDGKT" 8-VSSOP-THS4551 747,609 r90 top (schematic designator U1)
U9 "ADAR7251WBCSZ" ADI-CS-48-1_L 1370,1400 r45 top (schematic designator U3)
U10 "OPA325" SOT-23-5 1240,840 r180 top (schematic designator U7)
U11 "TPS76833QD" D8_TEX 1475,2475 r180 top (schematic designator U4)
U12 "OPA325" SOT-23-5-ALT 2745,2315 r90 top (schematic designator U6)
U13 "ADUM3160BRWZ" RW_16_ADI-L 2890,720 r90 top (schematic designator U8)
U14 "MIC29301-5.0WU-TR" TO-263-5_MCH 3091,2296.5 r0 top (schematic designator U5)
U15 "TPS76833QD" D8_TEX 3195,1450 r270 top (schematic designator U4)
XTAL1 "ECS-192-12-33-AGM-TR" XTAL_ECS-192-12-33-AGM-TR 1581.38,1109.46 r315 top

## Footprints (in the part's own frame and the unit in brackets; to place one, negate y for a bottom-side part, rotate by r counter-clockwise, add the part's x,y. Pads: shape width x height; smd on the part's side, far side on the other; paste and mask are expansions set on the pad)
8-VSSOP-THS4551 [mm]
  rect 1.45x0.45 smd: 1(-2.15,0.975) 2(-2.15,0.325) 3(-2.15,-0.325) 4(-2.15,-0.975) 5(2.15,-0.975) 6(2.15,-0.325) 7(2.15,0.325) 8(2.15,0.975)
  silkscreen extent -2.73,-1.5 1.5,1.65, body extent -2.48,-1.5 2.48,1.5, height 1.11
ADI-CS-48-1_L [mm] "QFN, 48-Leads, Body 7.1x7.1mm, Pitch 0.5mm, Thermal Pad 5.6x5.6mm, IPC High Density"
  oval 0.75x0.25 smd: 1(-3.375,2.75) 2(-3.375,2.25) 3(-3.375,1.75) 4(-3.375,1.25) 5(-3.375,0.75) 6(-3.375,0.25) 7(-3.375,-0.25) 8(-3.375,-0.75) 9(-3.375,-1.25) 10(-3.375,-1.75) 11(-3.375,-2.25) 12(-3.375,-2.75) 25(3.375,-2.75) 26(3.375,-2.25) 27(3.375,-1.75) 28(3.375,-1.25) 29(3.375,-0.75) 30(3.375,-0.25) 31(3.375,0.25) 32(3.375,0.75) 33(3.375,1.25) 34(3.375,1.75) 35(3.375,2.25) 36(3.375,2.75)
  oval 0.25x0.75 smd: 13(-2.75,-3.375) 14(-2.25,-3.375) 15(-1.75,-3.375) 16(-1.25,-3.375) 17(-0.75,-3.375) 18(-0.25,-3.375) 19(0.25,-3.375) 20(0.75,-3.375) 21(1.25,-3.375) 22(1.75,-3.375) 23(2.25,-3.375) 24(2.75,-3.375) 37(2.75,3.375) 38(2.25,3.375) 39(1.75,3.375) 40(1.25,3.375) 41(0.75,3.375) 42(0.25,3.375) 43(-0.25,3.375) 44(-0.75,3.375) 45(-1.25,3.375) 46(-1.75,3.375) 47(-2.25,3.375) 48(-2.75,3.375)
  rect 5.6x5.6 smd: 49(0,0)
  silkscreen extent -4.47,-3.7 3.7,3.7, body extent -3.5,-3.5 3.5,3.5, height 0.8
C0402 [mm]
  rect 0.59x0.63 smd: 1(-0.42,0) 2(0.42,0)
  body extent -0.5,-0.28 0.5,0.28, height 0.51
C0603 [mm]
  rect 0.5x0.9 smd: 1(-0.75,0) 2(0.75,0)
  silkscreen extent -1.22,-0.66 1.22,0.66, body extent -0.8,-0.4 0.8,0.4, height 0.81
C0805 [mm]
  rect 0.7x1.3 smd: 1(-0.95,0) 2(0.95,0)
  silkscreen extent -1.75,-1 1.7,1, body extent -1,-0.63 1,0.62, height 0.61
CAP_293D_D_VIS [mil]
  rect 89x99 smd paste+0 mask+0: 1(-111,0) 2(111,0)
  silkscreen extent -154,-96 154,96, body extent -149,-91 149,91, height 122
D8_TEX [mil]
  rect 57.5x22 smd paste+0 mask+0: 1(-107.25,75) 2(-107.25,25) 3(-107.25,-25) 4(-107.25,-75) 5(107.25,-75) 6(107.25,-25) 7(107.25,25) 8(107.25,75)
  silkscreen extent -84,-104 84,104, body extent -119,-96 119,96, height 64
EPC.00.250.NTN [mil] "NIM-CAMAC CD/N 549 Connector Receptacle, Female Socket 50Ohm Through Hole Solder"
  round 45 hole 31.5: 1(0,0) 2(-100,-100) 2(-100,100) 2(100,-100) 2(100,100)
  silkscreen extent -138,-138 138,138, body extent -138,-138 138,138, height 552
HEADERPINS_2X1 [mil]
  round 70 hole 40: 1(52,46) 2(152,46)
  silkscreen extent 0,1 203,91
HEADERPINS_2X1_POWER [mil]
  rect 60x60 hole 40: +(52,46) -(152,46)
  silkscreen extent 0,1 203,91
HEADERPINS_4X1 [mil]
  round 70 hole 40: 1(0,0) 2(100,0) 3(200,0) 4(300,0)
  silkscreen extent -51,-47 350,47
HRS_ZX62-B-5PA(33) [mm]
  rect 0.4x1.35 smd: 1(-1.3,2.675) 2(-0.65,2.675) 3(0,2.675) 4(0.65,2.675) 5(1.3,2.675)
  rect 1.8x1.9 smd: 6(-4,0) 6(4,0)
  rect 2.1x1.6 smd: 6(-3.1,2.55) 6(3.1,2.55)
  rect 1.9x1.9 smd: 6(-1.2,0) 6(1.2,0)
  silkscreen extent -3.75,1.17 3.75,4.25, body extent -4.04,-2.58 4.04,3.02, height 2.76
R0603 [mm]
  rect 0.5x0.9 smd: 1(-0.75,0) 2(0.75,0)
  silkscreen extent -1.22,-0.66 1.22,0.66, body extent -0.8,-0.4 0.8,0.4, height 0.81
RW_16_ADI-L [mil]
  rect 66x20 smd paste+0 mask+0: 1(-182.5,175) 2(-182.5,125) 3(-182.5,75) 4(-182.5,25) 5(-182.5,-25) 6(-182.5,-75) 7(-182.5,-125) 8(-182.5,-175) 9(182.5,-175) 10(182.5,-125) 11(182.5,-75) 12(182.5,-25) 13(182.5,25) 14(182.5,75) 15(182.5,125) 16(182.5,175)
  silkscreen extent -154,-212 154,212, body extent -209,-206 209,206, height 104
SOT-23-5 [mil]
  rect 50x21 smd: 1(-48,37) 2(-48,0) 3(-48,-37) 4(48,-37) 5(48,37)
  silkscreen extent -92,36 -88,40, body extent -55,-57 55,57, height 52
SOT-23-5-ALT [mil]
  rect 50x21 smd: 1(-48,37) 2(-48,0) 3(-48,-37) 4(48,-37) 5(48,37)
  silkscreen extent -51,60 -47,64, body extent -55,-57 55,57, height 52
TEENSY4.1 [mil]
  round 60 hole 40: 1(50,-650) 2(150,-650) 3(250,-650) 4(350,-650) 5(450,-650) 6(550,-650) 7(650,-650) 8(750,-650) 9(850,-650) 10(950,-650) 11(1050,-650) 12(1150,-650) 13(1250,-650) 14(1350,-650) 15(1450,-650) 16(1550,-650) 17(1650,-650) 18(1750,-650) 19(1850,-650) 20(1950,-650) 21(2050,-650) 22(2150,-650) 23(2250,-650) 24(2350,-650) 25(2350,-50) 26(2250,-50) 27(2150,-50) 28(2050,-50) 29(1950,-50) 30(1850,-50) 31(1750,-50) 32(1650,-50) 33(1550,-50) 34(1450,-50) 35(1350,-50) 36(1250,-50) 37(1150,-50) 38(1050,-50) 39(950,-50) 40(850,-50) 41(750,-50) 42(650,-50) 43(550,-50) 44(450,-50) 45(350,-50) 46(250,-50) 47(150,-50) 48(50,-50) 49(700,-529.92) 50(600,-529.92) 51(500,-529.92) 52(400,-529.92) 53(300,-529.92)
  silkscreen extent 0,-700 2400,0, body extent -50,-700 2399,0, height 291
TO-263-5_MCH [mil]
  rect 38x138 smd paste+0 mask+0: 1(-134,-356.5) 2(-67,-356.5) 3(0,-356.5) 4(67,-356.5) 5(134,-356.5)
  rect 258x333 smd paste+0 mask+0: 6(0,108)
  silkscreen extent -215,-274 215,218, body extent -210,-411 210,254, height 181
TP_5029 [mil]
  rect 80x150 smd: 1(0,0)
  body extent -40,-75 40,75, height 90
XTAL_ECS-192-12-33-AGM-TR [mm]
  rect 1.3x1.1 smd: 1(-1.15,-0.9) 2(1.15,-0.9) 3(1.15,0.9) 4(-1.15,0.9)
  silkscreen extent -2.45,-1.25 0.27,1.25, body extent -1.6,-1.26 1.6,1.24, height 0.81

## Part data
B1: library part "9V_BAT_conn_ 282837-2", Supplier Part Number 1=A113320-ND, Supplier 1=Digi-Key
C1 C4 C7 C10: library part CC0603KRX7R9BB331, "CAP CER 330PF 50V X7R 0603", Case Code (Imperial)=0603, Case Code (Metric)=1608, Dielectric=X7R, Insulation Resistance=10GR, Max Operating Temperature=125°C, Min Operating Temperature=-55°C, Package Quantity=1, Supplier Part Number 1=311-1186-1-ND, Tolerance=10%, Voltage Rating=50V, Capacitance=330pF, Case/Package=0603, ComponentLink1Description=https://datasheet.ciiva.com/8033/1489800-8033879.pdf?src-supplier=Element14, ComponentLink1URL=https://datasheet.ciiva.com/8033/1489800-8033879.pdf?src-supplier=Element14, ComponentLink2Description=https://datasheet.ciiva.com/17434/upy-gphc-x7r-6-3v-to-50v-8-17434663.pdf?src-supplier=Avnet+Europe, ComponentLink2URL=https://datasheet.ciiva.com/17434/upy-gphc-x7r-6-3v-to-50v-8-17434663.pdf?src-supplier=Avnet+Europe, ComponentLink3Description=https://datasheet.ciiva.com/144/mlccorderingcode-144456.pdf?src-supplier=Digi-Key, ComponentLink3URL=https://datasheet.ciiva.com/144/mlccorderingcode-144456.pdf?src-supplier=Digi-Key, ComponentLink4Description=https://datasheet.ciiva.com/144/mlccorderingcode-144454.pdf?src-supplier=Digi-Key, ComponentLink4URL=https://datasheet.ciiva.com/144/mlccorderingcode-144454.pdf?src-supplier=Digi-Key, ComponentLink5Description=https://datasheet.ciiva.com/144/mlccorderingcode-144455.pdf?src-supplier=Digi-Key, ComponentLink5URL=https://datasheet.ciiva.com/144/mlccorderingcode-144455.pdf?src-supplier=Digi-Key, ComponentLink6Description=https://datasheet.ciiva.com/11465/upy-gphc-x7r-6-3v-to-50v-8-11465240.pdf?src-supplier=Avnet, ComponentLink6URL=https://datasheet.ciiva.com/11465/upy-gphc-x7r-6-3v-to-50v-8-11465240.pdf?src-supplier=Avnet, ComponentLink7Description=https://datasheet.ciiva.com/8033/1489800-8033881.pdf?src-supplier=Element14, ComponentLink7URL=https://datasheet.ciiva.com/8033/1489800-8033881.pdf?src-supplier=Element14, ComponentLink8Description=https://datasheet.ciiva.com/7978/1489800-7978174.pdf?src-supplier=Element14, ComponentLink8URL=https://datasheet.ciiva.com/7978/1489800-7978174.pdf?src-supplier=Element14, Composition=Ceramic, Depth=0.8mm, Dissipation Factor=2.5%, Halogen Free="Halogen Free", Height=0.8mm, Lead Free="Lead Free", Length=1.6mm, Mount="Surface Mount", Packaging="Tape and Reel", Radiation Hardening=No, REACH SVHC=Unknown, RoHS=Yes, Supplier 1=Digi-Key, Termination=SMD/SMT, Thickness=0.035inch, Voltage Rating (DC)=50V, Width=0.8mm
C2 C5 C8 C11 C30 C32 C34 C36 C38 C40 C48 C61 C62 C63 C64 C66 C67: library part VJ0603Y104JXJCW1BC, "0603 0.1 uF 16 V ±5 % Tolerance X7R SMT Multilayer Ceramic Chip Capacitor", Capacitance=100nF, Case Code (Imperial)=0603, Case Code (Metric)=1608, Dielectric=X7R, Dielectric Material=Tantalum, Manufacturer 1="Vishay Vitramon", Max Operating Temperature=125°C, Min Operating Temperature=-55°C, Package Quantity=4000, Supplier Part Number 1=720-1685-1-ND, Tolerance=5%, Voltage Rating=16V, Case/Package=0603, ComponentLink1Description=https://datasheet.ciiva.com/5424/vjw1bcbascomseries-223529-5424533.pdf?src-supplier=Mouser, ComponentLink1URL=https://datasheet.ciiva.com/5424/vjw1bcbascomseries-223529-5424533.pdf?src-supplier=Mouser, ComponentLink2Description=https://datasheet.ciiva.com/11491/vjw1bcbascomseries-11491768.pdf?src-supplier=Avnet, ComponentLink2URL=https://datasheet.ciiva.com/11491/vjw1bcbascomseries-11491768.pdf?src-supplier=Avnet, ComponentLink3Description=https://datasheet.ciiva.com/16215/vjw1bcbascomseries-16215161.pdf?src-supplier=Future+Electronics, ComponentLink3URL=https://datasheet.ciiva.com/16215/vjw1bcbascomseries-16215161.pdf?src-supplier=Future+Electronics, Contact Plating=Tin,Matte, Depth=0.8mm, Height=0.95mm, Lead Free="Lead Free", Length=1.6mm, Manufacturer Part Number 1=VJ0603Y104JXJCW1BC, Mount="Surface Mount", Number of Pins=2, Packaging="Tape and Reel", Pricing 1="1=0.20000, 10=0.13400, 100=0.06780, 500=0.04636, 1000=0.04101 (USD)", RoHS=Yes, Stock 1=6936, Supplier 1=Digi-Key, Termination=SMD/SMT, Voltage Rating (DC)=16V, Width=0.8mm
C3 C6 C9 C12 C29 C31 C33 C35 C49: library part CL10B105KO8NNNC, "Cap Ceramic 1uF 16V X7R 10% SMD 0603 125C T/R", Case Code (Imperial)=0603, Case Code (Metric)=1608, Dielectric=X7R, Manufacturer 1=Samsung, Max Operating Temperature=125°C, Min Operating Temperature=-55°C, Supplier Part Number 1=1276-1019-1-ND, Tolerance=10%, Voltage=16V, Capacitance=1uF, Case/Package=0603, ComponentLink1Description=https://datasheet.ciiva.com/15195/getdatasheetpartid-357418-15195728.pdf?src-supplier=Verical, ComponentLink1URL=https://datasheet.ciiva.com/15195/getdatasheetpartid-357418-15195728.pdf?src-supplier=Verical, ComponentLink2Description=https://datasheet.ciiva.com/29198/458176-da-01-en-vs-kondensator-0603-29198478.pdf?src-supplier=Conrad, ComponentLink2URL=https://datasheet.ciiva.com/29198/458176-da-01-en-vs-kondensator-0603-29198478.pdf?src-supplier=Conrad, Depth=0.8mm, Height=0.8mm, Lead Free="Lead Free", Length=1.6mm, Manufacturer Part Number 1=CL10B105KO8NNNC, Material=Ceramic, Mount="Surface Mount", Packaging="Tape and Reel", Pricing 1="1=0.10000, 10=0.04800, 100=0.02120, 500=0.01516, 1000=0.01192 (USD)", Radiation Hardening=No, RoHS=Yes, Stock 1=4048324, Supplier 1=Digi-Key, Thickness=0.035inch, Voltage Rating=16V, Voltage Rating (DC)=16V, Width=0.031inch
C13 C14 C15 C16 C17 C18 C19 C20 C21 C22 C23 C24 C25 C26 C27 C28: library part C0603X103F3GACAUTO, "CAP CER 10000PF 25V C0G/NP0 0603", Capacitance=100nF, Case Code (Imperial)=0402, Case Code (Metric)=1005, Dielectric=X7R, Manufacturer 1=Murata, Manufacturer Part Number 1=GRM155R71A104JA01D, Max Operating Temperature=125°C, Min Operating Temperature=-55°C, Package Quantity=10000, Supplier Part Number 1=399-C0603X103F3GACAUTOCT-ND, Tolerance=5%, Voltage Rating=10V, Case/Package=0402, ComponentLink1Description=https://datasheet.ciiva.com/5411/product-5411135.pdf?src-supplier=Mouser, ComponentLink1URL=https://datasheet.ciiva.com/5411/product-5411135.pdf?src-supplier=Mouser, ComponentLink2Description=https://datasheet.ciiva.com/11618/c02e-11618821.pdf?src-supplier=Avnet, ComponentLink2URL=https://datasheet.ciiva.com/11618/c02e-11618821.pdf?src-supplier=Avnet, Depth=0.5mm, Height=0.5mm, Lead Free="Lead Free", Length=1mm, Mount="Surface Mount", Packaging="Tape and Reel", Pricing 1="1=0.10000, 10=0.02800, 100=0.01240, 500=0.00886, 1000=0.00696, 2500=0.00632, 5000=0.00582 (USD)", Radiation Hardening=No, RoHS=Yes, Stock 1=1113659, Supplier 1=Digi-Key, Termination=SMD/SMT, Thickness=0.022inch, Voltage Rating (DC)=10V, Width=0.02inch
C37 C44 C46 C71 C72 C73 C74 C75: library part GCM21BR71A106KE22K, "CAP CER 10UF 10V X7R 0805", Case Code (Imperial)=0805, Case Code (Metric)=2012, Dielectric=X7R, Manufacturer 1=Murata, Max Operating Temperature=125°C, Min Operating Temperature=-55°C, Package Quantity=10000, Ratings=AEC-Q200, Supplier Part Number 1=490-14531-1-ND, Tolerance=10%, Voltage Rating=10V, Capacitance=10uF, Case/Package=0805, ComponentLink1Description=http://www.mouser.com/ds/2/281/c03e-806517.pdf?src-supplier=Mouser, ComponentLink1URL=http://www.mouser.com/ds/2/281/c03e-806517.pdf?src-supplier=Mouser, ComponentLink2Description=http://search.murata.co.jp/Ceramy/image/img/A01X/G101/ENG/GCM21BR71A106KE22-01.pdf?src-supplier=Digi-Key, ComponentLink2URL=http://search.murata.co.jp/Ceramy/image/img/A01X/G101/ENG/GCM21BR71A106KE22-01.pdf?src-supplier=Digi-Key, ComponentLink3Description=http://search.murata.co.jp/Ceramy/image/img/A01X/partnumbering_e_02.pdf?src-supplier=Digi-Key, ComponentLink3URL=http://search.murata.co.jp/Ceramy/image/img/A01X/partnumbering_e_02.pdf?src-supplier=Digi-Key, Height=1.25mm, Length=0.079inch, Manufacturer Part Number 1=GCM21BR71A106KE22K, Mount="Surface Mount", Packaging="Tape and Reel", Pricing 1="1=0.57000, 10=0.40300, 100=0.26540, 500=0.19658, 1000=0.16709, 2500=0.15726, 5000=0.14744 (USD)", RoHS=Yes, Stock 1=78878, Supplier 1=Digi-Key, Termination=SMD/SMT, Thickness=0.055inch, Voltage Rating (DC)=10V, Weight=0.000335oz, Width=1.25mm
C39 C42 C60 C70: library part C0603C474J4RACAUTO, "KEMET - C0603C474J4RACAUTO - CAP, 0.47µF, 16V, 5%, X7R, 0603", Capacitance=470nF, Case/Package=0603, Dielectric=X7R, Manufacturer 1=KEMET, Max Operating Temperature=125°C, Min Operating Temperature=-55°C, Supplier Part Number 1=399-17596-1-ND, Tolerance=5%, ComponentLink1Description=http://www.farnell.com/datasheets/2749769.pdf?src-supplier=Farnell, ComponentLink1URL=http://www.farnell.com/datasheets/2749769.pdf?src-supplier=Farnell, ComponentLink2Description=http://components.arrow.com/part/dataview/0323_07310140?src-supplier=Arrow+Europe, ComponentLink2URL=http://components.arrow.com/part/dataview/0323_07310140?src-supplier=Arrow+Europe, ComponentLink3Description=https://api.kemet.com/component-edge/download/datasheet/C0603C474J4RACAUTO.pdf?src-supplier=Digi-Key, ComponentLink3URL=https://api.kemet.com/component-edge/download/datasheet/C0603C474J4RACAUTO.pdf?src-supplier=Digi-Key, ComponentLink4Description=http://www.farnell.com/datasheets/2749769.pdf?src-supplier=Element14, ComponentLink4URL=http://www.farnell.com/datasheets/2749769.pdf?src-supplier=Element14, ComponentLink5Description=http://www.farnell.com/datasheets/2749769.pdf?src-supplier=Newark, ComponentLink5URL=http://www.farnell.com/datasheets/2749769.pdf?src-supplier=Newark, Depth=0.8mm, Length=1.6mm, Manufacturer Part Number 1=C0603C474J4RACAUTO, Packaging="Tape and Reel", Pricing 1="1=0.51000, 10=0.35800, 100=0.23570, 500=0.17462, 1000=0.14842 (USD)", RoHS=Yes, Stock 1=10040, Supplier 1=Digi-Key
C41: library part VJ0603Y224KXJCW1BC, "Cap Ceramic 0.22uF 16V X7R 10% SMD 0603 125C Paper T/R", Capacitance=220nF, Case/Package=0603, Dielectric=X7R, Dielectric Material=Tantalum, Manufacturer 1="Vishay Vitramon", Max Operating Temperature=125°C, Min Operating Temperature=-55°C, Supplier Part Number 1=720-1853-1-ND, Tolerance=10%, Voltage Rating (DC)=16V, ComponentLink1Description=https://datasheet.ciiva.com/11490/vjw1bcbascomseries-11490982.pdf?src-supplier=Avnet, ComponentLink1URL=https://datasheet.ciiva.com/11490/vjw1bcbascomseries-11490982.pdf?src-supplier=Avnet, Depth=0.8mm, Lead Free="Lead Free", Length=1.6mm, Manufacturer Part Number 1=VJ0603Y224KXJCW1BC, Mount="Surface Mount", Packaging="Tape and Reel", Pricing 1="1=0.10000, 10=0.07000, 100=0.03100, 500=0.02214, 1000=0.01739 (USD)", RoHS=Yes, Stock 1=890490, Supplier 1=Digi-Key
C43 C45 C52 C54 C55 C56 C57 C58: library part GRM155R71A104JA01D, "0402 0.1 uF 10 V ±5% Tolerance X7R SMT Multilayer Ceramic Capacitor", Capacitance=100nF, Case Code (Imperial)=0402, Case Code (Metric)=1005, Dielectric=X7R, Manufacturer 1=Murata, Max Operating Temperature=125°C, Min Operating Temperature=-55°C, Package Quantity=10000, Supplier Part Number 1=490-10777-1-ND, Tolerance=5%, Voltage Rating=10V, Case/Package=0402, ComponentLink1Description=https://datasheet.ciiva.com/5411/product-5411135.pdf?src-supplier=Mouser, ComponentLink1URL=https://datasheet.ciiva.com/5411/product-5411135.pdf?src-supplier=Mouser, ComponentLink2Description=https://datasheet.ciiva.com/11618/c02e-11618821.pdf?src-supplier=Avnet, ComponentLink2URL=https://datasheet.ciiva.com/11618/c02e-11618821.pdf?src-supplier=Avnet, Depth=0.5mm, Height=0.5mm, Lead Free="Lead Free", Length=1mm, Manufacturer Part Number 1=GRM155R71A104JA01D, Mount="Surface Mount", Packaging="Tape and Reel", Pricing 1="1=0.10000, 10=0.02800, 100=0.01240, 500=0.00886, 1000=0.00696, 2500=0.00632, 5000=0.00582 (USD)", Radiation Hardening=No, RoHS=Yes, Stock 1=1113659, Supplier 1=Digi-Key, Termination=SMD/SMT, Thickness=0.022inch, Voltage Rating (DC)=10V, Width=0.02inch
C47 C68 C69: library part 293D226X9035D2TE3, "CAP TANT 22UF 10% 35V 2917", Capacitance=22uF, Case Code (Imperial)=2917, Case Code (Metric)=7343, Dielectric Material=Tantalum, ESR (Equivalent Series Resistance)=600mR, Leakage Current=7.7uA, Manufacturer 1="Vishay Sprague", Max Operating Temperature=125°C, Min Operating Temperature=-55°C, Package Quantity=1, Ripple Current=500mA, Supplier Part Number 1=718-1071-1-ND, Tolerance=10%, Voltage=35V, Voltage Rating (DC)=300kV, Case/Package=2917, Category="Tantalum Capacitors", ComponentLink1Description=https://datasheet.ciiva.com/11793/0900766b80d97b37-11793792.pdf?src-supplier=RSComponents, ComponentLink1URL=https://datasheet.ciiva.com/11793/0900766b80d97b37-11793792.pdf?src-supplier=RSComponents, ComponentLink2Description=https://datasheet.ciiva.com/3003/293d-3003938.pdf?src-supplier=Avnet, ComponentLink2URL=https://datasheet.ciiva.com/3003/293d-3003938.pdf?src-supplier=Avnet, ComponentLink3Description=https://datasheet.ciiva.com/16357/293d-16357928.pdf?src-supplier=Future+Electronics, ComponentLink3URL=https://datasheet.ciiva.com/16357/293d-16357928.pdf?src-supplier=Future+Electronics, ComponentLink4Description=https://datasheet.ciiva.com/22695/438417-22695144.pdf?src-supplier=Element14, ComponentLink4URL=https://datasheet.ciiva.com/22695/438417-22695144.pdf?src-supplier=Element14, ComponentLink5Description=https://datasheet.ciiva.com/260/293d-260029.pdf?src-supplier=Digi-Key, ComponentLink5URL=https://datasheet.ciiva.com/260/293d-260029.pdf?src-supplier=Digi-Key, ComponentLink6Description=https://datasheet.ciiva.com/260/293d-260031.pdf?src-supplier=Digi-Key, ComponentLink6URL=https://datasheet.ciiva.com/260/293d-260031.pdf?src-supplier=Digi-Key, ComponentLink7Description=https://datasheet.ciiva.com/1463/438417-1463353.pdf?src-supplier=Element14, ComponentLink7URL=https://datasheet.ciiva.com/1463/438417-1463353.pdf?src-supplier=Element14, ComponentLink8Description=https://datasheet.ciiva.com/260/293d-260030.pdf?src-supplier=Digi-Key, ComponentLink8URL=https://datasheet.ciiva.com/260/293d-260030.pdf?src-supplier=Digi-Key, Depth=4.3mm, Dissipation Factor=6%, Features="General Purpose", Height=2.8mm, Height - Seated (Max)=0.122inch, Lead Free="Lead Free", Length=7.3mm, Manufacturer Part Number 1=293D226X9035D2TE3, Mount="Surface Mount,PCB", Packaging="Tape and Reel", Polarity=Polar, Pricing 1="1=1.00000, 10=0.78800, 50=0.68260, 100=0.59060 (USD)", Radiation Hardening=No, REACH SVHC=Unknown, RoHS=Yes, Stock 1=31, Supplier 1=Digi-Key, Termination=SMD/SMT, Voltage Rating=35V, Weight=0.023634oz, Width=2.8mm
C50: library part 04025C562JAT2A, "Multilayer Ceramic Capacitors MLCC - SMD/SMT 50volts 5600pF 5% C0G", Case Code (Imperial)=0603, Case Code (Metric)=1608, Dielectric=C0G, Dielectric Material=Ceramic, Max Operating Temperature=125°C, Min Operating Temperature=-55°C, Package Quantity=4000, Supplier Part Number 1=478-10129-1-ND, Temperature Coefficient=30ppm/°C, Tolerance=5%, Voltage=50V, Capacitance=5.6nF, Case/Package=0603, ComponentLink1Description=https://datasheet.ciiva.com/28608/1372242-28608633.pdf?src-supplier=Element14, ComponentLink1URL=https://datasheet.ciiva.com/28608/1372242-28608633.pdf?src-supplier=Element14, ComponentLink2Description=https://datasheet.ciiva.com/22705/40889-22705450.pdf?src-supplier=Element14, ComponentLink2URL=https://datasheet.ciiva.com/22705/40889-22705450.pdf?src-supplier=Element14, ComponentLink3Description=https://datasheet.ciiva.com/26847/getdatasheetpartid-385577-26847722.pdf?src-supplier=Verical, ComponentLink3URL=https://datasheet.ciiva.com/26847/getdatasheetpartid-385577-26847722.pdf?src-supplier=Verical, ComponentLink4Description=https://datasheet.ciiva.com/7823/40889-7823822.pdf?src-supplier=Element14, ComponentLink4URL=https://datasheet.ciiva.com/7823/40889-7823822.pdf?src-supplier=Element14, ComponentLink5Description=https://datasheet.ciiva.com/5448/kem-c1003-c0g-smd-356956-5448159.pdf?src-supplier=Mouser, ComponentLink5URL=https://datasheet.ciiva.com/5448/kem-c1003-c0g-smd-356956-5448159.pdf?src-supplier=Mouser, Depth=0.8mm, Dissipation Factor=0.1%, Height=0.8mm, Lead Free="Lead Free", Length=1.6mm, Mount="Surface Mount", Number of Pins=2, Packaging="Tape and Reel", Radiation Hardening=No, REACH SVHC="No SVHC", RoHS=Yes, Supplier 1=Digi-Key, Termination=SMD/SMT, Thickness=0.034inch, Voltage Rating=50V, Voltage Rating (DC)=50V, Width=0.031inch
C51: library part 04025C391JAT2A, "CAP CER 390PF 50V C0G/NP0 0603", Case Code (Imperial)=0603, Case Code (Metric)=1608, Dielectric=C0G, Dielectric Material=Ceramic, Max Operating Temperature=125°C, Min Operating Temperature=-55°C, Package Quantity=1, Supplier Part Number 1=478-5269-1-ND, Temperature Coefficient=30ppm/°C, Tolerance=5%, Voltage=50V, Capacitance=390pF, Case/Package=0603, ComponentLink1Description=https://datasheet.ciiva.com/144/docfinderpartnumber-c0603c391j5gactu-144833.pdf?src-supplier=Digi-Key, ComponentLink1URL=https://datasheet.ciiva.com/144/docfinderpartnumber-c0603c391j5gactu-144833.pdf?src-supplier=Digi-Key, ComponentLink2Description=https://datasheet.ciiva.com/7823/40889-7823769.pdf?src-supplier=Element14, ComponentLink2URL=https://datasheet.ciiva.com/7823/40889-7823769.pdf?src-supplier=Element14, ComponentLink3Description=https://datasheet.ciiva.com/7823/40889-7823770.pdf?src-supplier=Element14, ComponentLink3URL=https://datasheet.ciiva.com/7823/40889-7823770.pdf?src-supplier=Element14, ComponentLink4Description=https://datasheet.ciiva.com/5415/kem-c1003-c0g-smd-356956-5415640.pdf?src-supplier=Mouser, ComponentLink4URL=https://datasheet.ciiva.com/5415/kem-c1003-c0g-smd-356956-5415640.pdf?src-supplier=Mouser, ComponentLink5Description=https://datasheet.ciiva.com/18102/getdatasheetpartid-77374-18102795.pdf?src-supplier=Verical, ComponentLink5URL=https://datasheet.ciiva.com/18102/getdatasheetpartid-77374-18102795.pdf?src-supplier=Verical, ComponentLink6Description=https://datasheet.ciiva.com/18219/getdatasheetpartid-385544-18219227.pdf?src-supplier=Verical, ComponentLink6URL=https://datasheet.ciiva.com/18219/getdatasheetpartid-385544-18219227.pdf?src-supplier=Verical, Depth=0.8mm, Dissipation Factor=0.1%, Height=0.8mm, Lead Free="Lead Free", Lead Pitch=0.7mm, Length=1.6mm, Mount="Surface Mount,PCB", Number of Pins=2, Packaging="Tape and Reel", Radiation Hardening=No, REACH SVHC="No SVHC", RoHS=Yes, Supplier 1=Digi-Key, Termination=SMD/SMT, Thickness=0.034inch, Voltage Rating=50V, Voltage Rating (DC)=50V, Width=0.8mm
C53 C59: library part 06035A190FAT2A, "Multilayer Ceramic Capacitors MLCC - SMD/SMT 50V 18pF C0G 0603 1% Tol", Capacitance=36pF, Case Code (Imperial)=0603, Case Code (Metric)=1608, Dielectric=C0G, Max Operating Temperature=125°C, Min Operating Temperature=-55°C, Package Quantity=8000, Supplier Part Number 1=478-10293-1-ND, Tolerance=1%, Voltage Rating=50V, Case/Package=0603, ComponentLink1Description=https://datasheet.ciiva.com/11567/ccog-11567927.pdf?src-supplier=Avnet, ComponentLink1URL=https://datasheet.ciiva.com/11567/ccog-11567927.pdf?src-supplier=Avnet, ComponentLink2Description=https://datasheet.ciiva.com/5423/ccog-243403-5423289.pdf?src-supplier=Mouser, ComponentLink2URL=https://datasheet.ciiva.com/5423/ccog-243403-5423289.pdf?src-supplier=Mouser, ComponentLink3Description=https://datasheet.ciiva.com/17492/ccog-17492554.pdf?src-supplier=Avnet+Europe, ComponentLink3URL=https://datasheet.ciiva.com/17492/ccog-17492554.pdf?src-supplier=Avnet+Europe, ComponentLink4Description=https://datasheet.ciiva.com/209/ccog-209692.pdf?src-supplier=Digi-Key, ComponentLink4URL=https://datasheet.ciiva.com/209/ccog-209692.pdf?src-supplier=Digi-Key, Depth=0.81mm, Length=1.6mm, Mount="Surface Mount", Packaging="Tape and Reel", Radiation Hardening=No, RoHS=Yes, Supplier 1=Digi-Key, Termination=SMD/SMT, Thickness=0.035inch, Voltage Rating (DC)=50V, Width=0.81mm
C65: library part VJ0805Y474JXJTW1BC, "Multilayer Ceramic Capacitors MLCC - SMD/SMT 0805 0.47uF 16volts X7R 5%", Capacitance=470nF, Case Code (Imperial)=0805, Case Code (Metric)=2012, Dielectric=X7R, Dielectric Material=Tantalum, Manufacturer 1="Vishay Vitramon", Max Operating Temperature=125°C, Min Operating Temperature=-55°C, Package Quantity=3000, Supplier Part Number 1=720-1774-1-ND, Tolerance=5%, Voltage Rating (DC)=16V, Case/Package=0805, ComponentLink1Description=https://datasheet.ciiva.com/11490/vjw1bcbascomseries-11490678.pdf?src-supplier=Avnet, ComponentLink1URL=https://datasheet.ciiva.com/11490/vjw1bcbascomseries-11490678.pdf?src-supplier=Avnet, ComponentLink2Description=https://datasheet.ciiva.com/5427/vjw1bcbascomseries-223529-5427159.pdf?src-supplier=Mouser, ComponentLink2URL=https://datasheet.ciiva.com/5427/vjw1bcbascomseries-223529-5427159.pdf?src-supplier=Mouser, Depth=1.25mm, Height=1.45mm, Lead Free="Lead Free", Length=2mm, Manufacturer Part Number 1=VJ0805Y474JXJTW1BC, Mount="Surface Mount", Packaging="Tape and Reel", Pricing 1="1=0.39000, 10=0.27000, 100=0.16180, 500=0.12132, 1000=0.10245 (USD)", RoHS=Yes, Stock 1=1897, Supplier 1=Digi-Key, Termination=SMD/SMT, Width=1.25mm
J1 J2 J3 J4: library part hydrophone_connector, Supplier Part Number 1=WM5378-ND, Supplier 1=Digi-Key, Supplier 2=Digi-Key, Supplier Part Number 2=WM8552-ND
J5: library part Teensy4.1
J6: library part J2
J7: library part ZX62-B-5PA(33), "HIROSE(HRS) - ZX62-B-5PA(33) - USB-Steckverbinder, Micro-USB Typ B, USB 2.0, Buchse, 5 -polig, Oberflächenmontage, Rechtwinklig", Supplier Part Number 1=H125270CT-ND, Supplier 1=Digi-Key
J8: library part J4, Supplier Part Number 1=SAM10843-ND, Supplier 1=Digi-Key
R1 R2 R3 R4: library part MCT06030C3300FP500, "RES SMD 330 OHM 1% 1/8W 0603", Case Code (Imperial)=0603, Case Code (Metric)=1608, Manufacturer 1="Vishay Beyschlag", Max Operating Temperature=125°C, Max Power Dissipation=125mW, Min Operating Temperature=-55°C, Package Quantity=1, Resistance=330R, Supplier Part Number 1=MCT0603-330-CFCT-ND, Temperature Coefficient=50ppm/°C, Tolerance=1%, Voltage Rating=75V, Case/Package=0603, ComponentLink1Description=https://datasheet.ciiva.com/2470/mc-pro-2470441.pdf?src-supplier=Digi-Key, ComponentLink1URL=https://datasheet.ciiva.com/2470/mc-pro-2470441.pdf?src-supplier=Digi-Key, ComponentLink2Description=https://datasheet.ciiva.com/2470/mc-pro-2470442.pdf?src-supplier=Digi-Key, ComponentLink2URL=https://datasheet.ciiva.com/2470/mc-pro-2470442.pdf?src-supplier=Digi-Key, ComponentLink3Description=https://datasheet.ciiva.com/2470/mc-pro-2470443.pdf?src-supplier=Digi-Key, ComponentLink3URL=https://datasheet.ciiva.com/2470/mc-pro-2470443.pdf?src-supplier=Digi-Key, ComponentLink4Description=https://datasheet.ciiva.com/16892/mc-pro-16892683.pdf?src-supplier=Avnet+Europe, ComponentLink4URL=https://datasheet.ciiva.com/16892/mc-pro-16892683.pdf?src-supplier=Avnet+Europe, ComponentLink5Description=https://datasheet.ciiva.com/8898/mc-pro-8898943.pdf?src-supplier=Avnet, ComponentLink5URL=https://datasheet.ciiva.com/8898/mc-pro-8898943.pdf?src-supplier=Avnet, Composition="Thin Film", Contact Plating=Tin, Depth=0.85mm, Height=0.022inch, Lead Free="Lead Free", Length=0.061inch, Manufacturer Part Number 1=MCT06030C3300FP500, Military Standard=Not, Number of Terminations=2, Packaging="Tape and Reel", Power Rating=125mW, Pricing 1="1=0.18000, 10=0.15200, 100=0.05960, 1000=0.02495, 2500=0.02287 (USD)", Radiation Hardening=No, REACH SVHC="No SVHC", RoHS=Yes, Stock 1=133742, Supplier 1=Digi-Key, Voltage Rating (DC)=75V, Width=0.033inch
R5 R6 R7 R8: library part HVC0603T5004FET, "RES SMD 5M OHM 1% 1/10W 0603", Case Code (Imperial)=0603, Case Code (Metric)=1608, Manufacturer 1="Vishay Dale", Manufacturer Part Number 1=TNPW06031K00BEEA, Max Operating Temperature=125°C, Max Power Dissipation=100mW, Min Operating Temperature=-55°C, Package Quantity=1, Resistance=1kR, Supplier Part Number 1=HVC0603T5004FETCT-ND, Temperature Coefficient=25ppm/°C, Tolerance=1%, Voltage Rating=75V, Case/Package=0603, ComponentLink1Description=https://datasheet.ciiva.com/2528/tnpw-e3-2528472.pdf?src-supplier=Digi-Key, ComponentLink1URL=https://datasheet.ciiva.com/2528/tnpw-e3-2528472.pdf?src-supplier=Digi-Key, ComponentLink2Description=https://datasheet.ciiva.com/2528/tnpw-e3-2528473.pdf?src-supplier=Digi-Key, ComponentLink2URL=https://datasheet.ciiva.com/2528/tnpw-e3-2528473.pdf?src-supplier=Digi-Key, ComponentLink3Description=https://datasheet.ciiva.com/9112/tnpw-e3-9112138.pdf?src-supplier=Avnet, ComponentLink3URL=https://datasheet.ciiva.com/9112/tnpw-e3-9112138.pdf?src-supplier=Avnet, ComponentLink4Description=https://datasheet.ciiva.com/16391/tnpw-e3-16391675.pdf?src-supplier=Future+Electronics, ComponentLink4URL=https://datasheet.ciiva.com/16391/tnpw-e3-16391675.pdf?src-supplier=Future+Electronics, ComponentLink5Description=https://datasheet.ciiva.com/9112/tnpw-e3-9112141.pdf?src-supplier=Avnet, ComponentLink5URL=https://datasheet.ciiva.com/9112/tnpw-e3-9112141.pdf?src-supplier=Avnet, ComponentLink6Description=https://datasheet.ciiva.com/16782/70201627-16782047.pdf?src-supplier=Allied+Electronics, ComponentLink6URL=https://datasheet.ciiva.com/16782/70201627-16782047.pdf?src-supplier=Allied+Electronics, Composition="Thin Film", Contact Plating=Tin, Depth=0.85mm, Features="Moisture Resistant,Automotive AEC-Q200,Anti-Sulfur", Height=0.45mm, Lead Free="Lead Free", Length=1.6mm, Military Standard=Not, Mount="Surface Mount", Number of Terminations=2, Packaging="Tape and Reel", Power Rating=100mW, Pricing 1="1=0.65000, 10=0.46200, 100=0.24020, 1000=0.12936, 2500=0.12760 (USD)", Radiation Hardening=No, REACH SVHC=Unknown, RoHS=Yes, Stock 1=92047, Supplier 1=Digi-Key, Termination=SMD/SMT, Voltage Rating (DC)=75V, Weight=7.1E-05oz, Width=0.033inch